# EAGLE board backplanev2-final (EAGLE 6.4), part 1 of 3
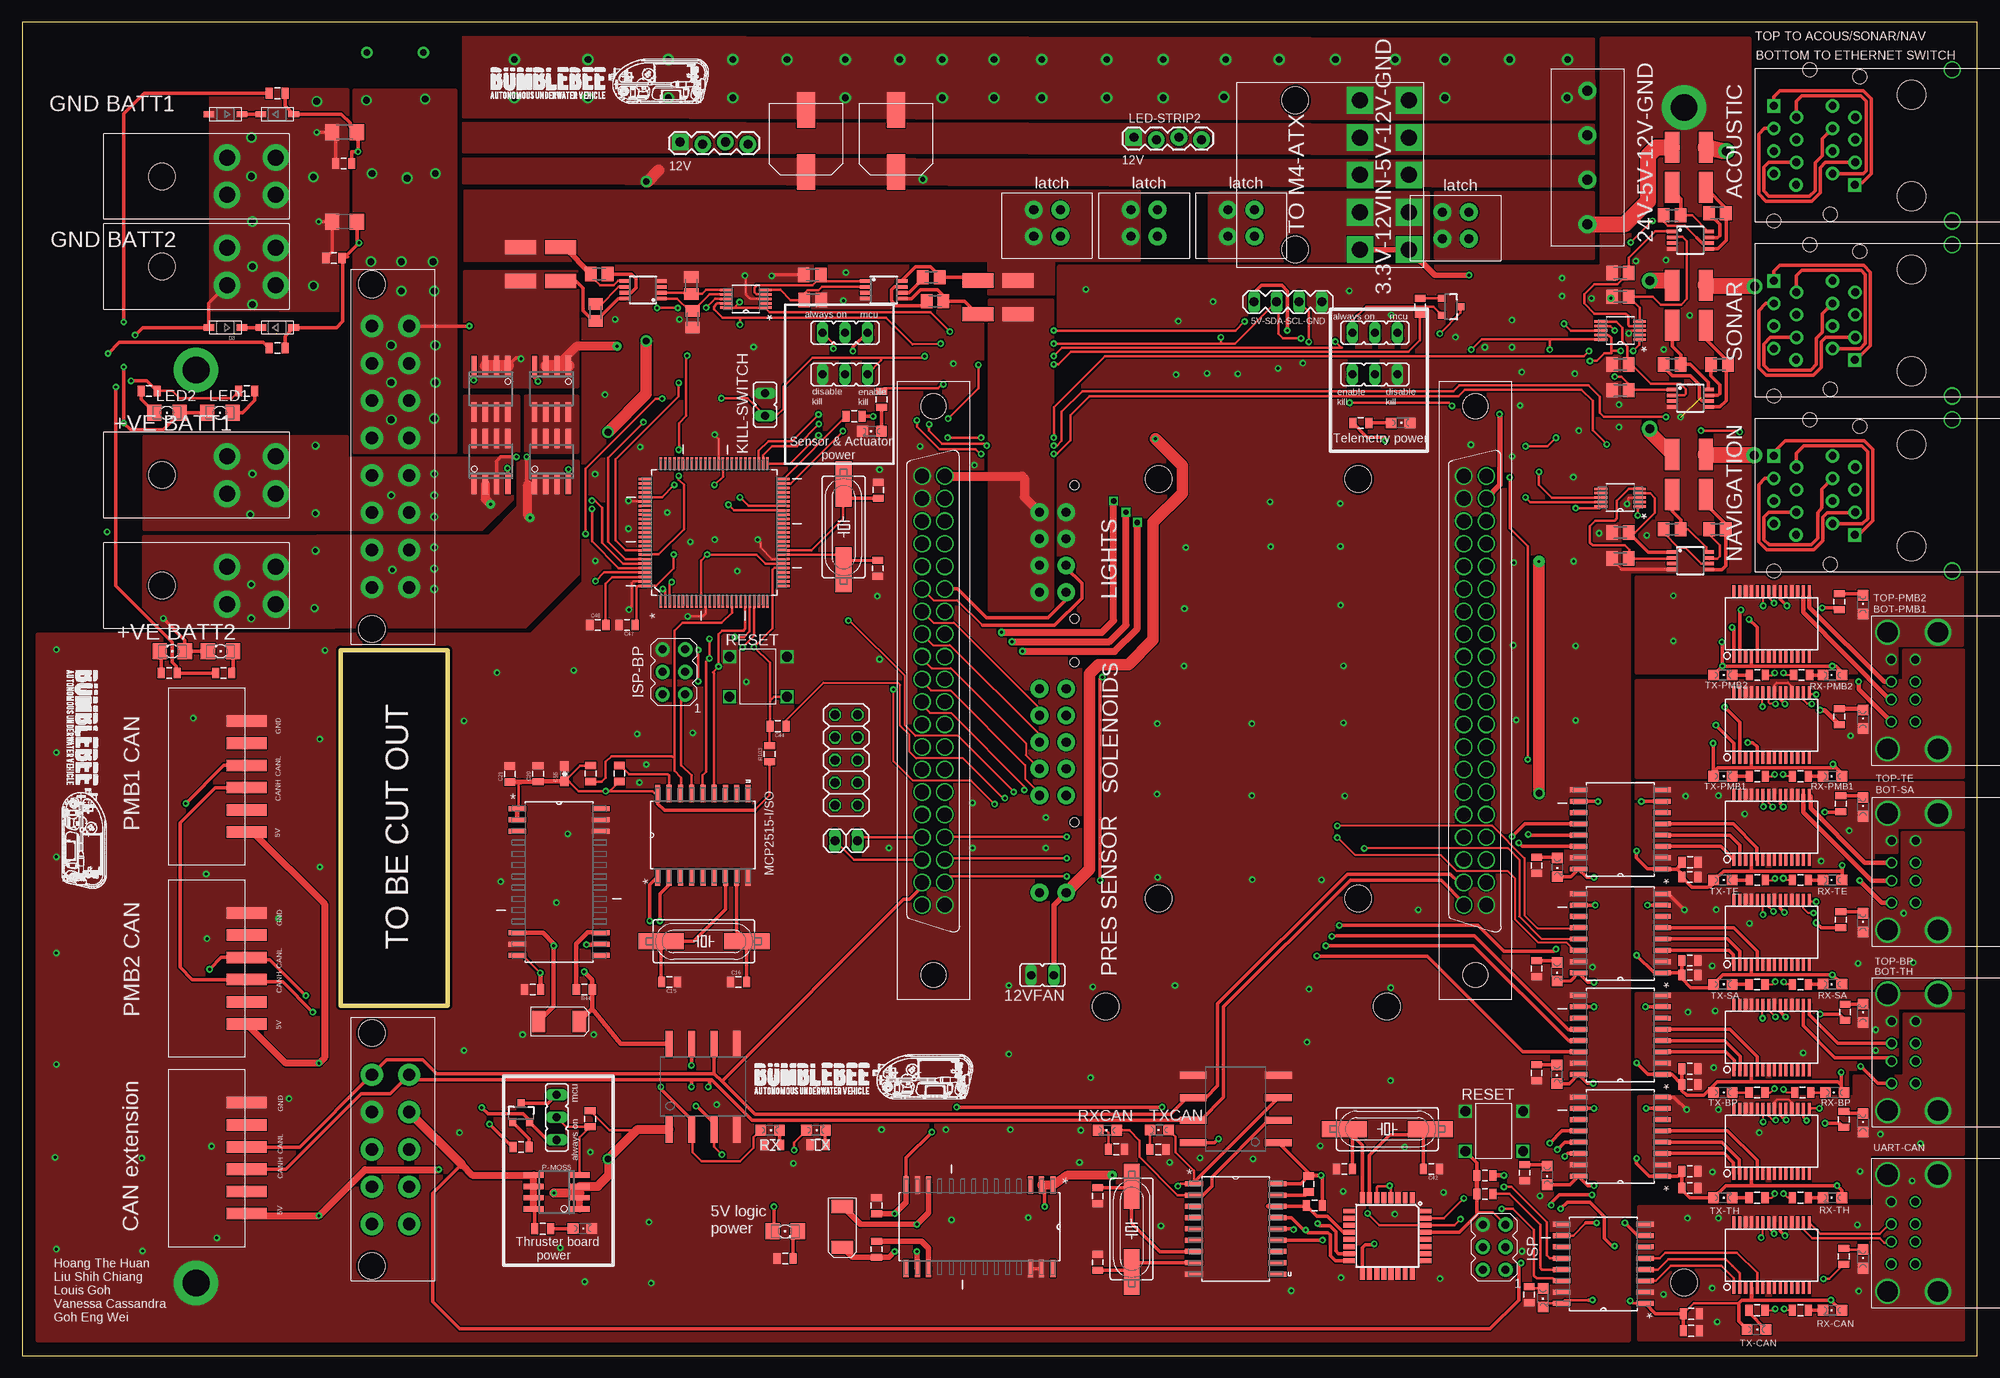
[diagram p0: board, top side]
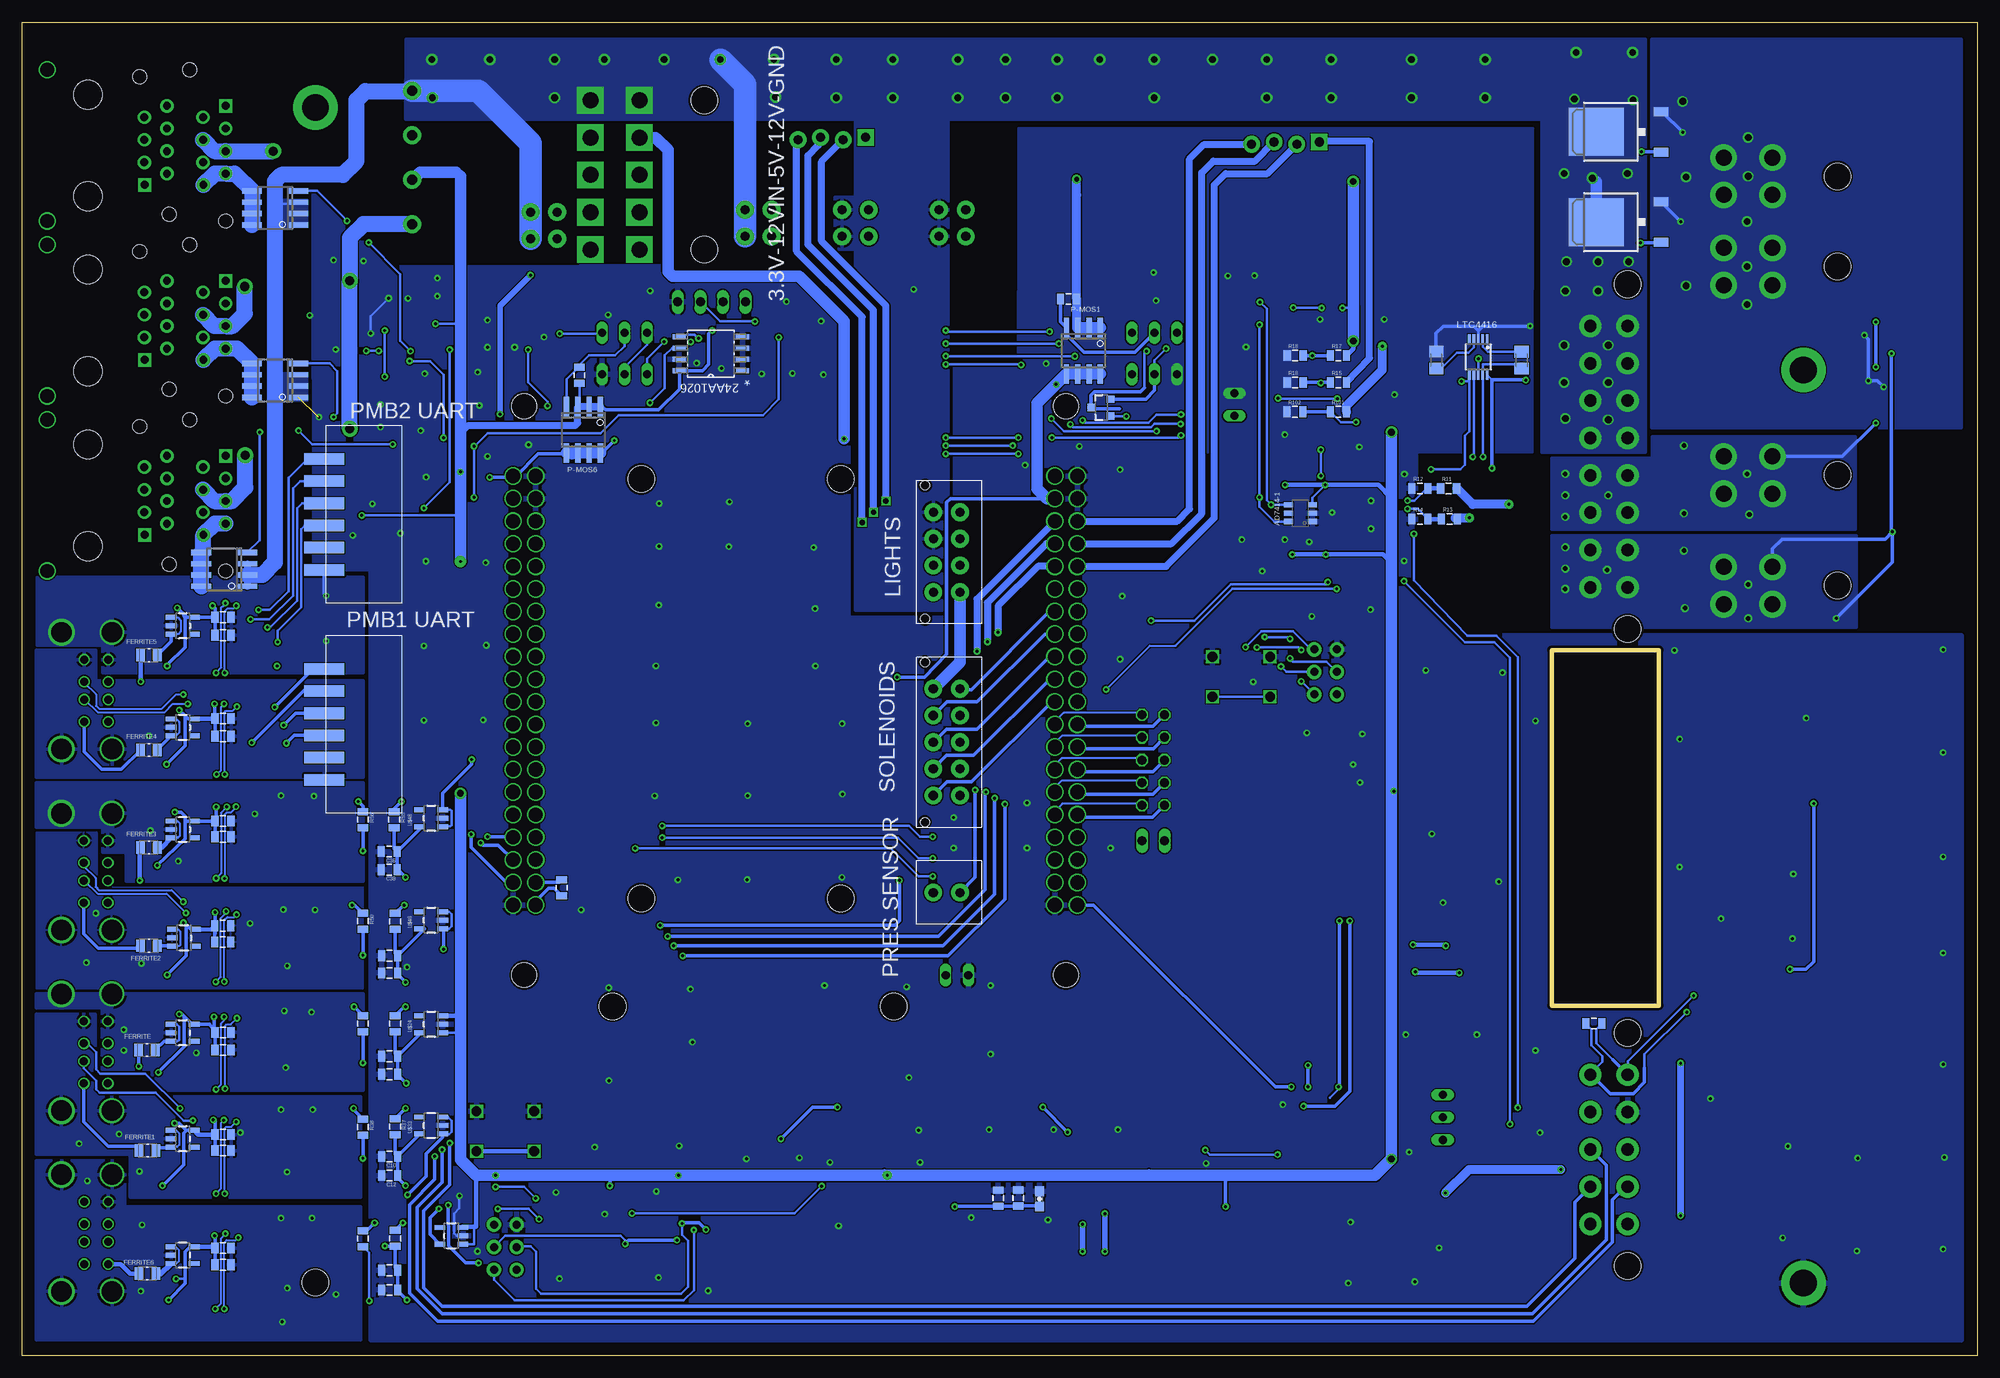
[diagram p1: board, bottom side, seen from below]

Size 220 x 150 mm. Coordinates in mm from the lower left corner, seen from the top.
Outline: 220,0 220,150 0,150 0,0 220,0
Outline: 35.81,79.38 47.88,79.38 47.88,39.37 35.81,39.37 35.81,79.38
Copper layers (1*16): Top 0.035mm / dielectric 1.5mm / Bottom 0.035mm
Design rules "DFRobot_Eagle_Rule_v0.4 *": minimum track width 8mil, minimum drill 12mil, track to track 6mil, track to pad 6mil, pad to pad 6mil, via to via 6mil, smd to smd 0mil, copper to edge 10mil, drill to drill 10mil, minimum pad ring 7mil, minimum via ring 8mil, stop-mask expansion 2mil, vias tented up to drill 25mil, thermal gap 10mil
Holes 3 mm at 150.34,98.6 150.34,51.41 127.89,51.41 127.89,98.6 121.92,39.29 153.57,39.29 187.02,8.2
Milling: 4 lines

## Footprints (pad centres in the part's own frame; a part is rotated, then mirrored left to right if it is on the bottom)
JP1 = drill 0.914 long: 1 0,-1.27; 2 0,1.27
SOIC127P794X200-8N = smd 1.473 x 0.559: 1 -3.581,1.905; 2 -3.581,0.635; 3 -3.581,-0.635; 4 -3.581,-1.905; 5 3.581,-1.905; 6 3.581,-0.635; 7 3.581,0.635; 8 3.581,1.905
SOT23-6 = smd 0.6 x 1.05: 1 -0.95,-1.35; 2 0,-1.35; 3 0.95,-1.35; 4 0.95,1.35; 5 0,1.35; 6 -0.95,1.35
SOIC127P1032X265-16N = smd 1.981 x 0.559: 1 -4.699,4.445; 2 -4.699,3.175; 3 -4.699,1.905; 4 -4.699,0.635; 5 -4.699,-0.635; 6 -4.699,-1.905; 7 -4.699,-3.175; 8 -4.699,-4.445; 9 4.699,-4.445; 10 4.699,-3.175; 11 4.699,-1.905; 12 4.699,-0.635; 13 4.699,0.635; 14 4.699,1.905; 15 4.699,3.175; 16 4.699,4.445
1206 = smd 1.6 x 1.8: 1 -1.4,0; 2 1.4,0
0805 = smd 0.8 x 1.2: 1 -0.9,0; 2 0.9,0
EIA6032 = smd 1.5 x 2.4: P$1 -2.3,0; P$2 2.3,0
0603-CAP = smd 1.1 x 1: 1 -0.85,0; 2 0.85,0
SOD-123 = smd 1.2 x 0.7: A 1.85,0; C -1.85,0
RESC2013X65N = smd 1.016 x 1.397: 1 -0.94,0; 2 0.94,0
MA04-1 = drill 1.016 long: 1 -3.81,0; 2 -1.27,0; 3 1.27,0; 4 3.81,0
AVRISP = drill 0.9 pad 1.626: 1 -1.27,2.54; 2 1.27,2.54; 3 -1.27,0; 4 1.27,0; 5 -1.27,-2.54; 6 1.27,-2.54
JP2 = drill 0.914 long: 1 -2.54,0; 2 0,0; 3 2.54,0
1206' = smd 1.6 x 1.803: A -1.422,0; C 1.422,0
1X04_LOCK = drill 1.016 pad 1.88 square: 1 0,0.127 | drill 1.016 pad 1.88: 2 2.54,-0.127; 3 5.08,0.127; 4 7.62,-0.127
MSOP10 = smd 0.3 x 1: 1 -1,-2.05; 2 -0.5,-2.05; 3 0,-2.05; 4 0.5,-2.05; 5 1,-2.05; 6 1,2.05; 7 0.5,2.05; 8 0,2.05; 9 -0.5,2.05; 10 -1,2.05
SOIC127P1034X264-18N = smd 1.981 x 0.559: 1 -4.699,5.08; 2 -4.699,3.81; 3 -4.699,2.54; 4 -4.699,1.27; 5 -4.699,0; 6 -4.699,-1.27; 7 -4.699,-2.54; 8 -4.699,-3.81; 9 -4.699,-5.08; 10 4.699,-5.08; 11 4.699,-3.81; 12 4.699,-2.54; 13 4.699,-1.27; 14 4.699,0; 15 4.699,1.27; 16 4.699,2.54; 17 4.699,3.81; 18 4.699,5.08
SOIC8 = smd 0.6 x 2.2: 1 -1.905,-2.6; 2 -0.635,-2.6; 3 0.635,-2.6; 4 1.905,-2.6; 5 1.905,2.6; 6 0.635,2.6; 7 -0.635,2.6; 8 -1.905,2.6
SOT23-3 = smd 0.8 x 0.9: 1 -0.95,-1; 2 0.95,-1; 3 0,1.1
SM49 = smd 5.08 x 1.778: 1 -4.826,0; 2 4.826,0
M0805 = smd 1.3 x 1.6: 1 -0.95,0; 2 0.95,0
CHIPLED_0805 = smd 1.2 x 1.2: A 0,-1.05; C 0,1.05
2X05 = drill 1.016 octagon: 1 -5.08,-1.27; 2 -5.08,1.27; 3 -2.54,-1.27; 4 -2.54,1.27; 5 0,-1.27; 6 0,1.27; 7 2.54,-1.27; 8 2.54,1.27; 9 5.08,-1.27; 10 5.08,1.27
1X02 = drill 1.016 long: 1 -1.27,0; 2 1.27,0
MC32829 = drill 1.1 square: P$1 -3.25,-2.25; P$2 -3.25,2.25; P$3 3.25,2.25; P$4 3.25,-2.25
TQFP32-08 = smd 1.27 x 0.559: 1 -4.293,2.8; 2 -4.293,2; 3 -4.293,1.2; 4 -4.293,0.4; 5 -4.293,-0.4; 6 -4.293,-1.2; 7 -4.293,-2; 8 -4.293,-2.8; 17 4.293,-2.8; 18 4.293,-2; 19 4.293,-1.2; 20 4.293,-0.4; 21 4.293,0.4; 22 4.293,1.2; 23 4.293,2; 24 4.293,2.8 | smd 0.559 x 1.27: 9 -2.8,-4.293; 10 -2,-4.293; 11 -1.2,-4.293; 12 -0.4,-4.293; 13 0.4,-4.293; 14 1.2,-4.293; 15 2,-4.293; 16 2.8,-4.293; 25 2.8,4.293; 26 2,4.293; 27 1.2,4.293; 28 0.4,4.293; 29 -0.4,4.293; 30 -1.2,4.293; 31 -2,4.293; 32 -2.8,4.293
SSOP28DB = smd 0.348 x 1.397: 1 -4.225,-3.656; 2 -3.575,-3.656; 3 -2.925,-3.656; 4 -2.275,-3.656; 5 -1.625,-3.656; 6 -0.975,-3.656; 7 -0.325,-3.656; 8 0.325,-3.656; 9 0.975,-3.656; 10 1.625,-3.656; 11 2.275,-3.656; 12 2.925,-3.656; 13 3.575,-3.656; 14 4.225,-3.656; 15 4.225,3.656; 16 3.575,3.656; 17 2.925,3.656; 18 2.275,3.656; 19 1.625,3.656; 20 0.975,3.656; 21 0.325,3.656; 22 -0.325,3.656; 23 -0.975,3.656; 24 -1.625,3.656; 25 -2.275,3.656; 26 -2.925,3.656; 27 -3.575,3.656; 28 -4.225,3.656
SOIC127P1032X265-12NA = smd 1.981 x 0.559: 1 -4.699,8.255; 2 -4.699,6.985; 3 -4.699,5.715; 12 -4.699,-5.715; 13 -4.699,-6.985; 14 -4.699,-8.255; 15 4.699,-8.255; 16 4.699,-6.985; 17 4.699,-5.715; 26 4.699,5.715; 27 4.699,6.985; 28 4.699,8.255
QFP50P1600X1600X120-100N = smd 1.473 x 0.279: 1 -7.747,5.994; 2 -7.747,5.512; 3 -7.747,5.004; 4 -7.747,4.496; 5 -7.747,3.988; 6 -7.747,3.505; 7 -7.747,2.997; 8 -7.747,2.489; 9 -7.747,2.007; 10 -7.747,1.499; 11 -7.747,0.991; 12 -7.747,0.508; 13 -7.747,0; 14 -7.747,-0.508; 15 -7.747,-0.991; 16 -7.747,-1.499; 17 -7.747,-2.007; 18 -7.747,-2.489; 19 -7.747,-2.997; 20 -7.747,-3.505; 21 -7.747,-3.988; 22 -7.747,-4.496; 23 -7.747,-5.004; 24 -7.747,-5.512; 25 -7.747,-5.994; 51 7.747,-5.994; 52 7.747,-5.512; 53 7.747,-5.004; 54 7.747,-4.496; 55 7.747,-3.988; 56 7.747,-3.505; 57 7.747,-2.997; 58 7.747,-2.489; 59 7.747,-2.007; 60 7.747,-1.499; 61 7.747,-0.991; 62 7.747,-0.508; 63 7.747,0; 64 7.747,0.508; 65 7.747,0.991; 66 7.747,1.499; 67 7.747,2.007; 68 7.747,2.489; 69 7.747,2.997; 70 7.747,3.505; 71 7.747,3.988; 72 7.747,4.496; 73 7.747,5.004; 74 7.747,5.512; 75 7.747,5.994 | smd 0.279 x 1.473: 26 -5.994,-7.747; 27 -5.512,-7.747; 28 -5.004,-7.747; 29 -4.496,-7.747; 30 -3.988,-7.747; 31 -3.505,-7.747; 32 -2.997,-7.747; 33 -2.489,-7.747; 34 -2.007,-7.747; 35 -1.499,-7.747; 36 -0.991,-7.747; 37 -0.508,-7.747; 38 0,-7.747; 39 0.508,-7.747; 40 0.991,-7.747; 41 1.499,-7.747; 42 2.007,-7.747; 43 2.489,-7.747; 44 2.997,-7.747; 45 3.505,-7.747; 46 3.988,-7.747; 47 4.496,-7.747; 48 5.004,-7.747; 49 5.512,-7.747; 50 5.994,-7.747; 76 5.994,7.747; 77 5.512,7.747; 78 5.004,7.747; 79 4.496,7.747; 80 3.988,7.747; 81 3.505,7.747; 82 2.997,7.747; 83 2.489,7.747; 84 2.007,7.747; 85 1.499,7.747; 86 0.991,7.747; 87 0.508,7.747; 88 0,7.747; 89 -0.508,7.747; 90 -0.991,7.747; 91 -1.499,7.747; 92 -2.007,7.747; 93 -2.489,7.747; 94 -2.997,7.747; 95 -3.505,7.747; 96 -3.988,7.747; 97 -4.496,7.747; 98 -5.004,7.747; 99 -5.512,7.747; 100 -5.994,7.747
TERM-BLOCK-4POS = drill 1.1 pad 2: P$1 2.5,4.1; P$2 7.5,4.1; P$3 12.5,4.1; P$4 17.5,4.1
PLATED-HOLE = drill 3 pad 5: P$1 0,0
RJ45DOUBLESOCKET = drill 1.57 pad 1.8: CHA5 0,0; CHA6 17.01,0 | drill 0.89 pad 1.5 square: L1 4.06,10.96; U1 12.95,20.06 | drill 0.89 pad 1.5: L2 5.33,13.46; L3 6.6,10.92; L4 7.87,13.46; L5 9.14,10.92; L6 10.41,13.46; L7 11.68,10.92; L8 12.95,13.46; U2 11.68,17.52; U3 10.41,20.06; U4 9.14,17.52; U5 7.87,20.06; U6 6.6,17.52; U7 5.33,20.06; U8 4.06,17.56 | hole 3.25: 2.79,4.57; 14.22,4.57 | hole 1.57: 17.01,16; 0,20.06; 0.76,13.71; 16.25,10.41
MINIFIT-16CKT-STRAIGHTHEADER = drill 1.4 pad 2.5: L1 35.81,2.94; L2 31.61,2.94; L3 27.41,2.94; L4 23.21,2.94; L5 19.01,2.94; L6 14.81,2.94; L7 10.61,2.94; L8 6.41,2.94; U1 35.81,7.14; U2 31.61,7.14; U3 27.41,7.14; U4 23.21,7.14; U5 19.01,7.14; U6 14.81,7.14; U7 10.61,7.14; U8 6.41,7.14 | hole 3: 40.51,7.14; 1.71,7.14
100UF-AFK-CAP = smd 2 x 4: NEG 4.15,0.7; POS 4.15,7.7
MSOP8 = smd 0.4 x 1.2: 1 -0.975,-2.05; 2 -0.325,-2.05; 3 0.325,-2.05; 4 0.975,-2.05; 5 0.975,2.05; 6 0.325,2.05; 7 -0.325,2.05; 8 -0.975,2.05
TO252 = smd 1 x 1.6: 1 -2.28,-4.8; 2 2.28,-4.8 | smd 5.4 x 6.2: 3 0,2.5
S6B-XH-SM4-TB(LF)(SN) = smd 1.3 x 4.5: P$1 3.8,8.75; P$2 6.3,8.75; P$3 8.8,8.75; P$4 11.3,8.75; P$5 13.8,8.75; P$6 16.3,8.75
FCN-365J040-BACKPLANE-JACK = drill 1.6 pad 1.85: A1 10.625,5.415; A2 13.17,5.42; A3 15.71,5.42; A4 18.25,5.42; A5 20.79,5.42; A6 23.33,5.42; A7 25.87,5.42; A8 28.41,5.42; A9 30.95,5.42; A10 33.49,5.42; A11 36.03,5.42; A12 38.57,5.42; A13 41.11,5.42; A14 43.65,5.42; A15 46.19,5.42; A16 48.73,5.42; A17 51.27,5.42; A18 53.81,5.42; A19 56.35,5.42; A20 58.89,5.42; B1 10.625,2.875; B2 13.17,2.88; B3 15.71,2.88; B4 18.25,2.88; B5 20.79,2.88; B6 23.33,2.88; B7 25.87,2.88; B8 28.41,2.88; B9 30.95,2.88; B10 33.49,2.88; B11 36.03,2.88; B12 38.57,2.88; B13 41.11,2.88; B14 43.65,2.88; B15 46.19,2.88; B16 48.73,2.88; B17 51.27,2.88; B18 53.81,2.88; B19 56.35,2.88; B20 58.89,2.88 | hole 2.8: 2.75,4.125; 66.75,4.125
MICROFIT-2CKT-HEADER = drill 1.02 pad 2: PIN1 3.58,-1.9; PIN2 3.58,-4.9
MICROFIT-8CKT-HEADER = drill 1.02 pad 2: BOT1 3.59,-4.91; BOT2 6.59,-4.91; BOT3 9.59,-4.91; BOT4 12.59,-4.91; TOP1 3.59,-1.91; TOP2 6.59,-1.91; TOP3 9.59,-1.91; TOP4 12.59,-1.91 | hole 1.02: 0.59,-0.97; 15.59,-0.97
MICROFIT-10CKT-HEADER = drill 1.02 pad 2: B1 3.57,-4.9; B2 6.57,-4.9; B3 9.57,-4.9; B4 12.57,-4.9; B5 15.57,-4.9; T1 3.57,-1.9; T2 6.57,-1.9; T3 9.57,-1.9; T4 12.57,-1.9; T5 15.57,-1.9 | hole 1.02: 0.57,-0.96; 18.57,-0.96
SOP50P490X110-10N = smd 1.422 x 0.279: 1 -2.184,0.991; 2 -2.184,0.508; 3 -2.184,0; 4 -2.184,-0.508; 5 -2.184,-0.991; 6 2.184,-0.991; 7 2.184,-0.508; 8 2.184,0; 9 2.184,0.508; 10 2.184,0.991
LVK25R002FER(CURRENT-SENSE-R) = smd 1.6 x 3.5: I1 0.8,1.75; I2 4.6,1.75; V1 0.8,6.25; V2 4.6,6.25
SOT23-5 = smd 0.55 x 1.2: 1 -0.95,-1.3; 2 0,-1.3; 3 0.95,-1.3; 4 0.95,1.3; 5 -0.95,1.3
USB-DUAL-SOCKET = drill 2.3 pad 2.8: CHA1 1.89,15.91; CHA3 15.03,15.91 | drill 2.3 pad 3: CHA2 1.89,10.24; CHA4 15.03,10.23 | drill 0.9 pad 1.2: L1 4.96,12.78; L2 7.46,12.78; L3 9.46,12.78; L4 11.96,12.78; U1 4.96,15.48; U2 7.46,15.48; U3 9.46,15.48; U4 11.96,15.48
DUB-8 = smd 0.8 x 3: 1 -3.81,-4.8; 2 -1.27,-4.8; 3 1.27,-4.8; 4 3.81,-4.8; 5 3.81,4.8; 6 1.27,4.8; 7 -1.27,4.8; 8 -3.81,4.8
MINIFIT-4CKT-2ROW-W2B-90DEG = drill 1.8 pad 3: LL -2.1,7.3; LR 2.1,7.3; UL -2.1,12.8; UR 2.1,12.8 | hole 3: 0,0
MOLEX-MINIFIT-10CKT2ROW-90DEG-HEADER = drill 1.8 pad 3 square: A1 0,12.8; A2 4.2,12.8; A3 8.4,12.8; A4 12.6,12.8; A5 16.8,12.8; B1 0,7.3; B2 4.2,7.3; B3 8.4,7.3; B4 12.6,7.3; B5 16.8,7.3 | hole 3: 0,0; 16.8,0
MINIFIT-10CKT-STRAIGHTHEADER = drill 1.4 pad 2.5: L1 23.21,2.94; L2 19.01,2.94; L3 14.81,2.94; L4 10.61,2.94; L5 6.41,2.94; U1 23.21,7.14; U2 19.01,7.14; U3 14.81,7.14; U4 10.61,7.14; U5 6.41,7.14 | hole 3: 27.91,7.14; 1.71,7.14
MICROFIT-4CKT-HEADER = drill 1.02 pad 2: BOT1 3.59,-4.91; BOT2 6.59,-4.91; TOP1 3.59,-1.91; TOP2 6.59,-1.91

## Placement (x,y rotation side)
12VFAN  [JP1]  114.81,42.8 90 top
24AA1026  24AA1026-I/SM  [SOIC127P794X200-8N]  142.51,112.71 180 bottom
AD7414-1  AD7414-1  [SOT23-6]  76.17,94.77 90 bottom
ADUM1  ADUM1402  [SOIC127P1032X265-16N]  177.93,10.31 180 top
ADUM2  ADUM1402  [SOIC127P1032X265-16N]  179.83,24.64 180 top
ADUM3  ADUM1402  [SOIC127P1032X265-16N]  179.83,47.5 180 top
ADUM4  ADUM1402  [SOIC127P1032X265-16N]  179.83,59.18 180 top
ADUM1402  ADUM1402  [SOIC127P1032X265-16N]  179.83,36.07 180 top
C1  1uF  [1206]  36.27,137.62 180 top
C2  1uF  [1206]  36.27,127.56 180 top
C3  0.1uF  [0805]  187.66,32.26 0 top
C4  10uF  [0805]  178.66,33.68 180 bottom
C5  10uF  [0805]  187.66,30.48 0 top
C6  0.1uF  [0805]  178.66,31.65 180 bottom
C7  0.1uF  [0805]  197.41,36.35 0 bottom
C8  10uF  [0805]  197.41,34.39 0 bottom
C9  0.1uF  [0805]  187.66,20.73 0 top
C10  10uF  [0805]  178.66,22.4 180 bottom
C11  10uF  [0805]  187.66,18.85 0 top
C12  0.1uF  [0805]  178.66,20.24 180 bottom
C13  0.1uF  [0805]  197.41,23.06 0 bottom
C14  10uF  [0805]  197.41,24.87 0 bottom
C15  22pF  [0805]  72.83,42.02 180 top
C16  22pF  [0805]  80.59,42.03 0 top
C17  22pF  [0805]  96.28,88.57 90 top
C18  22pF  [0805]  96.34,97.36 270 top
C19  100nF  [0805]  57.45,41.2 0 top
C20  100nF  [0805]  58.05,65.46 90 top
C21  100nF  [0805]  54.86,65.42 90 top
C22  22pF  [0805]  121.01,17.96 90 top
C23  22pF  [0805]  121.02,10.49 270 top
C24  0.1uF  [0805]  187.81,2.8 0 top
C25  10uF  [0805]  178.66,9.6 180 bottom
C26  100nF  [0805]  96.14,16.87 270 top
C27  100nF  [0805]  110.17,17.71 90 bottom
C28  100nF  [0805]  107.91,17.73 90 bottom
C29  0.1uF  [0805]  187.66,44.45 0 top
C30  10uF  [0805]  178.66,43.05 180 bottom
C31  10uF  [0805]  187.66,42.82 0 top
C32  0.1uF  [0805]  178.66,44.98 180 bottom
C33  0.1uF  [0805]  197.43,48.36 0 bottom
C34  10uF  [0805]  197.43,46.51 0 bottom
C35  0.1uF  [0805]  187.68,55.5 0 top
C36  10uF  [0805]  178.71,56.69 180 bottom
C37  10uF  [0805]  187.66,53.85 0 top
C38  0.1uF  [0805]  178.71,54.66 180 bottom
C39  0.1uF  [0805]  197.41,60.15 0 bottom
C40  10uF  [0805]  197.41,58.37 0 bottom
C41  10uF  [0805]  164.59,18.19 180 top
C42  22pF  [0805]  158.57,21.01 180 top
C43  22pF  [0805]  148.79,20.98 0 top
C44  10uF  [0805]  85.04,70.79 180 top
C45  0.1uF  [0805]  197.41,69.67 0 bottom
C46  10uF  [0805]  197.41,71.65 0 bottom
C47  10uF  [0805]  68.07,82.19 180 top
C48  10uF  [0805]  64.77,82.19 0 top
C51  0.1uF  [0805]  197.41,81.03 0 bottom
C52  10uF  [0805]  197.41,83.06 0 bottom
C53  [EIA6032]  92.3,14.48 90 top
C54  [EIA6032]  60.41,37.59 180 top
C55  [0603-CAP]  61.01,65.45 90 top
C56  [0603-CAP]  105.54,17.63 90 bottom
C57  10uF  [0805]  187.81,4.7 0 top
C58  0.1uF  [0805]  178.66,7.39 180 bottom
C59  0.1uF  [0805]  197.41,12.09 0 bottom
C60  10uF  [0805]  197.41,10.21 0 bottom
D1  10V Zener  [SOD-123]  22.86,139.65 180 top
D2  [SOD-123]  28.7,139.65 0 top
D3  10V Zener  [SOD-123]  22.86,115.65 180 top
D4  [SOD-123]  28.7,115.65 0 top
FERRITE  [RESC2013X65N]  205.97,34.39 0 bottom
FERRITE1  [RESC2013X65N]  205.89,23.06 0 bottom
FERRITE2  [RESC2013X65N]  205.74,46.1 0 bottom
FERRITE3  [RESC2013X65N]  205.74,57.15 0 bottom
FERRITE4  [RESC2013X65N]  205.74,68.12 0 bottom
FERRITE5  [RESC2013X65N]  205.74,78.79 0 bottom
FERRITE6  [RESC2013X65N]  205.92,9.22 0 bottom
I2C  [MA04-1]  142.42,118.54 180 top
ISP  AVRISP-6  [AVRISP]  165.63,12.19 180 top
ISP-BP  AVRISP-6  [AVRISP]  73.33,76.91 180 top
JP5  [JP2]  60.15,26.79 90 top
JP6  [JP2]  92.58,115.06 0 top
JP8  [JP2]  92.58,110.39 180 top
JP9  [JP2]  152.22,115.06 0 top
JP10  [JP2]  152.22,110.39 180 top
KILL-SWITCH  [JP1]  83.59,106.98 180 top
LED1  [1206']  22.25,106.07 0 top
LED2  [1206']  16.29,106.07 0 top
LED3  [1206']  16.89,79.22 180 top
LED4  [1206']  22.32,79.22 180 top
LED5  5V logic power  [1206']  85.85,13.97 0 top
LED-STRIP1  LED STRIP  [1X04_LOCK]  74.04,136.4 0 top
LED-STRIP2  LED STRIP  [1X04_LOCK]  125.08,136.91 0 top
LTC4416  LTC4416  [MSOP10]  56.16,112.35 180 bottom
MCP2515-I/SO  MCP2515-I/SO  [SOIC127P1034X264-18N]  76.6,58.55 90 top
P-MOS  P-MOS  [SOIC8]  59.56,108.76 180 top
P-MOS1  P-MOS  [SOIC8]  100.58,113.03 180 bottom
P-MOS2  P-MOS  [SOIC8]  59.56,100.58 0 top
P-MOS3  P-MOS  [SOIC8]  52.76,108.76 180 top
P-MOS4  P-MOS  [SOIC8]  52.76,100.58 0 top
P-MOS5  P-MOS  [SOIC8]  60.15,18.4 90 top
P-MOS6  P-MOS  [SOIC8]  156.84,104.14 180 bottom
Q1  MMBT2222A  [SOT23-3]  98.55,106.65 90 bottom
Q2  MMBT2222A  [SOT23-3]  56.13,27.26 0 top
Q3  16Mhz  [SM49]  124.84,14.23 270 top
Q4  16Mhz  [SM49]  76.71,46.61 0 top
Q5  16Mhz  [SM49]  92.44,93.22 90 top
Q6  MMBT2222A  [SOT23-3]  160.76,117.98 270 top
Q7  16Mhz  [SM49]  153.62,25.48 180 top
R1  10k  [M0805]  51.28,111.98 270 bottom
R2  10k  [M0805]  60.87,112.01 270 bottom
R3  300  [0805]  14.27,108.51 180 top
R4  300  [0805]  25.27,108.51 0 top
R5  1M  [0805]  36.17,134.11 0 top
R6  1M  [0805]  28.7,142.01 180 top
R7  300  [0805]  22.66,76.78 0 top
R8  300  [0805]  16.54,76.78 180 top
R9  1M  [0805]  35.08,123.47 0 top
R10  [0805]  28.7,113.34 180 top
R11  [0805]  59.49,97.56 0 bottom
R12  [0805]  62.71,97.56 0 bottom
R13  [0805]  59.39,94.11 0 bottom
R14  [0805]  62.71,94.11 0 bottom
R15  [0805]  71.88,109.47 0 bottom
R16  [0805]  76.76,109.47 0 bottom
R17  [0805]  71.88,112.5 0 bottom
R18  [0805]  76.76,112.5 0 bottom
R19  [M0805]  75.44,116.59 270 top
R20  [M0805]  75.29,120.4 90 top
R21  [M0805]  64.92,121.67 0 top
R22  [M0805]  64.52,117.35 90 top
R23  [M0805]  88.9,121.56 180 top
R24  [M0805]  88.95,118.75 0 top
R25  [M0805]  102.72,118.62 180 top
R26  [M0805]  102.31,121.31 180 top
R27  10k  [0805]  102.26,118.85 0 bottom
R28  1k  [0805]  93.62,105.66 180 top
R29  10k  [0805]  63.9,26.62 90 top
R30  1k  [0805]  56.14,23.47 180 top
R31  [0805]  178.03,37.34 270 bottom
R32  [0805]  181.66,37.34 270 bottom
R33  300  [0805]  195.22,29.59 180 top
R34  300  [0805]  200.36,29.59 0 top
R35  300  [0805]  205.13,38.63 90 top
R36  300  [0805]  170.41,31.8 270 top
R37  [0805]  178.03,25.76 270 bottom
R38  [0805]  181.66,25.7 270 bottom
R39  300  [0805]  200.1,17.75 0 top
R40  300  [0805]  195.22,17.75 180 top
R41  300  [0805]  204.98,26.57 90 top
R42  300  [0805]  169.06,20.57 270 top
R43  10k  [0805]  67.18,65.48 270 top
R44  [0805]  63.25,41.19 180 top
R45  [0805]  178.03,13.18 270 bottom
R46  10k  [0805]  144.75,19.3 90 top
R47  10k  [0805]  96.14,11.96 90 top
R48  10k  [0805]  145.42,16.87 180 top
R49  [0805]  178.03,48.84 270 bottom
R50  [0805]  181.66,48.87 270 bottom
R51  300  [0805]  195.22,41.76 180 top
R52  300  [0805]  200.1,41.76 0 top
R53  300  [0805]  204.65,49.02 90 top
R54  300  [0805]  170.41,43.54 270 top
R55  [0805]  178.16,60.3 270 bottom
R56  [0805]  181.66,60.3 270 bottom
R57  300  [0805]  195.25,53.49 180 top
R58  300  [0805]  200.1,53.49 0 top
R59  300  [0805]  204.65,62.08 90 top
R60  300  [0805]  170.41,55.14 270 top
R61  300  [0805]  127.81,23.19 180 top
R62  300  [0805]  123.11,23.22 180 top
R63  300  [0805]  195.25,65.18 180 top
R64  300  [0805]  200.1,65.18 0 top
R65  300  [0805]  204.47,71.88 90 top
R66  300  [0805]  150.63,104.93 0 top
R67  300  [0805]  58.57,14.27 0 top
R68  [0805]  96.7,107.57 270 top
R69  300  [0805]  195.25,76.56 180 top
R70  300  [0805]  200.23,76.56 0 top
R71  300  [0805]  204.47,84.81 90 top
R72  [0805]  164.59,20.27 180 top
R73  10k  [0805]  63.96,65.48 90 top
R74  [0805]  181.66,13.16 270 bottom
R75  300  [0805]  200.1,5.11 0 top
R76  300  [0805]  195.22,5.11 180 top
R77  300  [0805]  204.98,11.15 90 top
R78  300  [0805]  169.58,6.86 270 top
R79  [0805]  157.3,110.29 270 bottom
R80  1k  [0805]  157.3,118.03 270 top
R81  [M0805]  179.83,121.79 180 top
R82  [M0805]  179.83,119.13 180 top
R83  [M0805]  190.75,128.52 180 top
R84  [M0805]  185.67,128.27 180 top
R85  [M0805]  179.83,108.58 180 top
R86  [M0805]  179.83,111.51 180 top
R87  [M0805]  191.01,111.51 180 top
R88  [M0805]  185.67,111.51 180 top
R89  [M0805]  179.83,92.58 180 top
R90  [M0805]  179.83,89.66 180 top
R91  [M0805]  190.75,92.96 180 top
R92  [M0805]  185.67,92.96 180 top
R93  300  [0805]  89.56,23.72 0 top
R94  300  [0805]  84.43,23.67 0 top
R95  300  [0805]  85.85,10.92 0 top
R101  [0805]  71.88,106.17 0 bottom
R102  [0805]  76.78,106.17 0 bottom
R103  [0805]  84.1,67.69 90 top
R104  120  [0805]  43.15,37.34 180 bottom
R105  120  [0805]  159.31,52.63 270 bottom
RX  [CHIPLED_0805]  84.15,25.35 270 top
RX-BP  [CHIPLED_0805]  203.96,29.59 90 top
RX-CAN  [CHIPLED_0805]  203.71,5.11 90 top
RX-PMB1  [CHIPLED_0805]  203.71,65.18 90 top
RX-PMB2  [CHIPLED_0805]  203.71,76.56 90 top
RX-SA  [CHIPLED_0805]  203.71,41.78 90 top
RX-TE  [CHIPLED_0805]  203.71,53.49 90 top
RX-TH  [CHIPLED_0805]  203.71,17.75 90 top
RXCAN  [CHIPLED_0805]  122.12,25.35 90 top
SA  [CHIPLED_0805]  95.61,103.99 90 top
SPARE  SA SPARE  [2X05]  92.74,67 270 top
SPARE2  SA SPARE  [1X02]  92.71,57.91 180 top
SW1  RESET  [MC32829]  165.63,25.22 180 top
SW2  RESET  [MC32829]  82.83,76.35 180 top
SW_5V_BP  [CHIPLED_0805]  172.69,31.65 180 top
SW_5V_CAN  [CHIPLED_0805]  171.13,6.5 180 top
SW_5V_SA  [CHIPLED_0805]  172.72,43.18 180 top
SW_5V_TE  [CHIPLED_0805]  172.75,54.94 180 top
SW_5V_TH  [CHIPLED_0805]  171.6,20.27 180 top
SW_USB_BP  [CHIPLED_0805]  207.14,38.51 0 top
SW_USB_CAN  [CHIPLED_0805]  207.14,10.87 0 top
SW_USB_PMB1  [CHIPLED_0805]  207.14,71.58 0 top
SW_USB_PMB2  [CHIPLED_0805]  207.14,84.48 0 top
SW_USB_SA  [CHIPLED_0805]  207.14,26.19 0 top
SW_USB_SA1  [CHIPLED_0805]  207.14,48.72 0 top
SW_USB_TE  [CHIPLED_0805]  207.14,61.72 0 top
TE  [CHIPLED_0805]  155.1,104.93 270 top
TH  [CHIPLED_0805]  63.04,14.3 270 top
TX  [CHIPLED_0805]  89.31,25.35 270 top
TX-BP  [CHIPLED_0805]  191.36,29.59 270 top
TX-CAN  [CHIPLED_0805]  195.15,2.92 270 top
TX-PMB1  [CHIPLED_0805]  191.36,65.18 270 top
TX-PMB2  [CHIPLED_0805]  191.36,76.56 270 top
TX-SA  [CHIPLED_0805]  191.36,41.76 270 top
TX-TE  [CHIPLED_0805]  191.36,53.49 270 top
TX-TH  [CHIPLED_0805]  191.36,17.75 270 top
TXCAN  [CHIPLED_0805]  127.97,25.37 90 top
U1  ATMEGA328P_TQFP  [TQFP32-08]  153.62,13.46 270 top
U2  FT232RLSSOP  [SSOP28DB]  196.85,35.79 0 top
U3  FT232RLSSOP  [SSOP28DB]  196.85,24.1 0 top
U4  DCR010505U  [SOIC127P1032X265-12NA]  107.72,14.48 270 top
U5  DCR010505U  [SOIC127P1032X265-12NA]  60.41,53.27 0 top
U6  FT232RLSSOP  [SSOP28DB]  196.85,11.3 0 top
U7  FT232RLSSOP  [SSOP28DB]  196.85,47.62 0 top
U8  FT232RLSSOP  [SSOP28DB]  196.85,59.44 0 top
U9  FT232RLSSOP  [SSOP28DB]  196.85,70.92 0 top
U11  FT232RLSSOP  [SSOP28DB]  196.85,82.32 0 top
U13  ATMEGA2560-16AU  [QFP50P1600X1600X120-100N]  77.86,92.59 90 top
U$1  TERM-BLOCK-4POS  [TERM-BLOCK-4POS]  172.01,144.78 270 top
U$2  PLATED-HOLE  [PLATED-HOLE]  19.57,8.15 0 top
U$3  RJ45-DUAL-SOCKET  [RJ45DOUBLESOCKET]  217.17,127.64 90 top
U$4  MINIFIT-16CKT-STRAIGHTHEADER  [MINIFIT-16CKT-STRAIGHTHEADER]  46.48,80.01 90 top
U$5  100UF  [100UF-AFK-CAP]  92.35,140.84 180 top
U$6  LTC6103  [MSOP8]  69.85,119.89 90 top
U$7  IRLR3636PBF(N-MOS)  [TO252]  40.39,127.51 90 bottom
U$8  S6B-XH-SM4-TB(LF)(SN)  [S6B-XH-SM4-TB(LF)(SN)]  177.29,60.96 90 bottom
U$9  S6B-XH-SM4-TB(LF)(SN)  [S6B-XH-SM4-TB(LF)(SN)]  177.29,84.58 90 bottom
U$10  S6B-XH-SM4-TB(LF)(SN)  [S6B-XH-SM4-TB(LF)(SN)]  16.51,53.59 270 top
U$11  [FCN-365J040-BACKPLANE-JACK]  167.64,40.06 90 top
U$12  LTC6103  [MSOP8]  96.95,119.89 270 top
U$13  MICROFIT-2CK-HEADER  [MICROFIT-2CKT-HEADER]  119.38,48.5 90 bottom
U$14  MICROFIT-8CKT-HEADER  [MICROFIT-8CKT-HEADER]  119.38,82.3 90 bottom
U$15  MICROFIT-10CKT-HEADER  [MICROFIT-10CKT-HEADER]  119.38,59.44 90 bottom
U$16  [FCN-365J040-BACKPLANE-JACK]  106.68,40.06 90 top
U$17  S6B-XH-SM4-TB(LF)(SN)  [S6B-XH-SM4-TB(LF)(SN)]  16.51,32.26 270 top
U$18  ADS1115  [SOP50P490X110-10N]  81.43,118.87 180 top
U$19  S6B-XH-SM4-TB(LF)(SN)  [S6B-XH-SM4-TB(LF)(SN)]  16.51,75.18 270 top
U$20  LVK25R002FER(CURRENT-SENSE-R)  [LVK25R002FER(CURRENT-SENSE-R)]  54.36,125.48 270 top
U$21  LVK25R002FER(CURRENT-SENSE-R)  [LVK25R002FER(CURRENT-SENSE-R)]  113.79,116.33 90 top
U$22  100UF  [100UF-AFK-CAP]  102.46,140.84 180 top
U$23  MIC2005A-1YM5  [SOT23-5]  201.96,36.32 270 bottom
U$24  MIC2005A-1YM5  [SOT23-5]  173.99,37.26 90 bottom
U$25  MCP2515-I/SO  [SOIC127P1034X264-18N]  136.55,14.25 0 top
U$26  RJ45-DUAL-SOCKET  [RJ45DOUBLESOCKET]  217.17,107.95 90 top
U$27  RJ45-DUAL-SOCKET  [RJ45DOUBLESOCKET]  217.17,88.27 90 top
U$28  MIC2005A-1YM5  [SOT23-5]  201.93,59.18 270 bottom
U$29  USB-DUAL-SOCKET  [USB-DUAL-SOCKET]  225.81,66.34 90 top
U$30  USB-DUAL-SOCKET  [USB-DUAL-SOCKET]  225.83,25.65 90 top
U$31  MIC2005A-1YM5  [SOT23-5]  201.96,24.38 270 bottom
U$32  IRLR3636PBF(N-MOS)  [TO252]  40.39,137.67 90 bottom
U$33  MIC2005A-1YM5  [SOT23-5]  173.99,25.88 90 bottom
U$34  ISO1050  [DUB-8]  136.55,27.74 90 top
U$35  MINIFIT-4CKT-2ROW-W2B-90DEG  [MINIFIT-4CKT-2ROW-W2B-90DEG]  15.75,122.51 270 top
U$36  MINIFIT-4CKT-2ROW-W2B-90DEG  [MINIFIT-4CKT-2ROW-W2B-90DEG]  15.75,132.67 270 top
U$37  MINIFIT-4CKT-2ROW-W2B-90DEG  [MINIFIT-4CKT-2ROW-W2B-90DEG]  15.75,99.06 270 top
U$38  MINIFIT-4CKT-2ROW-W2B-90DEG  [MINIFIT-4CKT-2ROW-W2B-90DEG]  15.75,86.61 270 top
U$39  MOLEX-MINIFIT-10CKT2ROW-90DEG-HEADER  [MOLEX-MINIFIT-10CKT2ROW-90DEG-HEADER]  143.26,141.22 270 top
U$40  ISO1050  [DUB-8]  76.6,30.26 0 top
U$41  USB-DUAL-SOCKET  [USB-DUAL-SOCKET]  225.81,5.33 90 top
U$44  MIC2005A-1YM5  [SOT23-5]  201.8,46.99 270 bottom
U$45  MINIFIT-10CKT-STRAIGHTHEADER  [MINIFIT-10CKT-STRAIGHTHEADER]  46.48,8.38 90 top
U$46  MIC2005A-1YM5  [SOT23-5]  173.99,48.97 90 bottom
U$47  USB-DUAL-SOCKET  [USB-DUAL-SOCKET]  225.83,45.97 90 top
U$48  MIC2005A-1YM5  [SOT23-5]  173.99,60.45 90 bottom
U$49  MIC2005A-1YM5  [SOT23-5]  201.93,70.66 270 bottom
U$50  PLATED-HOLE  [PLATED-HOLE]  19.57,110.89 0 top
U$51  MIC2005A-1YM5  [SOT23-5]  201.93,82.09 270 bottom
U$52  MICROFIT-4CKT-HEADER  [MICROFIT-4CKT-HEADER]  110.24,130.81 0 top
U$53  MIC2005A-1YM5  [SOT23-5]  201.96,11.3 270 bottom
U$54  MIC2005A-1YM5  [SOT23-5]  171.7,13.46 90 bottom
U$55  LTC6103  [MSOP8]  187.71,125.48 270 top
U$56  LTC6103  [MSOP8]  187.71,107.7 270 top
U$57  ADS1115  [SOP50P490X110-10N]  179.83,115.32 180 top
U$58  LVK25R002FER(CURRENT-SENSE-R)  [LVK25R002FER(CURRENT-SENSE-R)]  190.25,137.67 180 top
U$59  LVK25R002FER(CURRENT-SENSE-R)  [LVK25R002FER(CURRENT-SENSE-R)]  190.25,122.17 180 top
U$60  LTC6103  [MSOP8]  187.71,89.41 270 top
U$61  MICROFIT-4CKT-HEADER  [MICROFIT-4CKT-HEADER]  121.16,130.81 0 top
U$62  ADS1115DGST  [SOP50P490X110-10N]  179.83,96.52 180 top
U$63  LVK25R002FER(CURRENT-SENSE-R)  [LVK25R002FER(CURRENT-SENSE-R)]  190.25,103.12 180 top
U$64  MICROFIT-4CKT-HEADER  [MICROFIT-4CKT-HEADER]  132.08,130.81 0 top
U$65  MICROFIT-4CKT-HEADER  [MICROFIT-4CKT-HEADER]  156.21,130.56 0 top
U$66  [BBAUV-LOGO-4]  81.79,27.43 0 top
U$67  [BBAUV-LOGO-4]  52.07,139.45 0 top
U$68  [BBAUV-LOGO-4]  3.05,77.72 270 top
U$70  PLATED-HOLE  [PLATED-HOLE]  187,140.4 0 top
U$76  N-MOS-SOIC8  [SOIC8]  197.26,88.44 90 bottom
U$77  N-MOS  [SOIC8]  191.54,129.11 90 bottom
U$78  N-MOS-SOIC8  [SOIC8]  191.54,109.7 90 bottom

## Library data of the parts
12VFAN JP5 JP6 JP8-JP10 KILL-SWITCH = jumper
24AA1026 = backplaneBBAUVv3; MPN: 24AA1026-I/SM; OC_FARNELL: 1971893; OC_NEWARK: 59T0229; PACKAGE: SOIC-8; SUPPLIER: MICROCHIP
AD7414-1 U$18 U$34 U$40 U$57 U$62 = bbauv
ADUM1-ADUM4 ADUM1402 = backplaneBBAUVv3; MPN: ADUM1402ARWZ; OC_FARNELL: 1226223; OC_NEWARK: 19M0759; PACKAGE: SOIC-16; SUPPLIER: Analog Devices
C1-C19 C22-C26 C29-C48 C51 C52 C57-C60 = SparkFun-Capacitors
C20 C21 C27 C28 = SparkFun-Capacitors; OC_NEWARK: unknown; PROD_ID: CAP-08064
C53-C56 R31-R42 R45 R49-R72 R74-R78 R93 R94 R103 = SparkFun-Passives
D1-D4 ISP ISP-BP LED1-LED5 = adafruit
FERRITE FERRITE1-FERRITE6 LTC4416 P-MOS P-MOS1-P-MOS6 U$1-U$10 U$12-U$15 U$17 U$19-U$24 U$26-U$33 U$35-U$38 U$41 U$44-U$51 U$53-U$56 U$58-U$60 U$63 U$66-U$68 U$70 U$76-U$78 = backplaneBBAUVv3
I2C = con-lstb; OC_FARNELL: unknown; OC_NEWARK: unknown
LED-STRIP1 LED-STRIP2 = SparkFun-Connectors
MCP2515-I/SO U$25 = backplaneBBAUVv3; MPN: MCP2515-I/SO; OC_FARNELL: 1292239; OC_NEWARK: 29H7136; PACKAGE: SOIC-18; SUPPLIER: Microchip
Q1 Q2 Q6 = SparkFun-DiscreteSemi; PROD_ID: TRANS-08049
Q3-Q5 Q7 = adafruit; OC_FARNELL: unknown; OC_NEWARK: unknown
R1 R2 R19-R26 R81-R92 = resistor
R3-R18 R27-R30 R43 R44 R46-R48 R73 R79 R80 R95 R101 R102 R104 R105 = SparkFun-Resistors
RX RX-BP RX-CAN RX-PMB1 RX-PMB2 RX-SA RX-TE RX-TH RXCAN SA SW_5V_BP SW_5V_CAN SW_5V_SA SW_5V_TE SW_5V_TH SW_USB_BP SW_USB_CAN SW_USB_PMB1 SW_USB_PMB2 SW_USB_SA SW_USB_SA1 SW_USB_TE TE TH TX TX-BP TX-CAN TX-PMB1 TX-PMB2 TX-SA TX-TE TX-TH TXCAN = led
SPARE SPARE2 = pinhead
SW1 SW2 = ver4
U1 = SparkFun-DigitalIC; PROD_ID: IC-09069
U2 U3 U6-U9 U11 = SparkFun-DigitalIC; PROD_ID: IC-00870
U4 U5 = backplaneBBAUVv3; MPN: DCR010505U; OC_FARNELL: 1212384; OC_NEWARK: 84K1268; PACKAGE: SSOP-12; SUPPLIER: TEXAS INSTRUMENTS
U13 = backplaneBBAUVv3; DESCRIPTION: Microcontroller; MPN: ATMEGA2560-16AU; OC_FARNELL: 1288330; OC_NEWARK: 23M5051; PACKAGE: LQFP-100; SUPPLIER: ATMEL
U$11 U$16 = FCN-365J040-BACKPLANE-JACK
U$39 = molex-minifit-10ckt2row-w2b-90degheader
U$52 U$61 U$64 U$65 = microfit-4ckt-2row-header

## Nets
3.3V: U$11.B19 U$39.A5 U$39.B5
5V: 24AA1026.8 AD7414-1.3 C20.1 C21.1 C27.1 C28.1 C47.1 C55.1 C56.1 I2C.4 LED5.A MCP2515-I/SO.18 P-MOS1.1 P-MOS1.2 P-MOS1.3 P-MOS5.1 P-MOS5.2 P-MOS5.3 P-MOS6.1 P-MOS6.2 P-MOS6.3 R17.2 R27.2 R29.2 R43.2 R46.2 R48.1 R72.1 R73.2 R79.2 R103.1 U1.4 U1.6 U4.1 U4.2 U5.1 U5.2 U13.10 U13.31 U13.61 U13.80 U13.100 U$1.P$3 U$5.POS U$10.P$6 U$17.P$6 U$18.8 U$19.P$6 U$22.POS U$24.1 U$24.3 U$25.18 U$34.1 U$39.A3 U$39.B3 U$40.1 U$54.1 U$54.3 U$57.8 U$62.1 U$62.8
5V_ADC: R17.1 R18.2 U13.93
5V_CAN_BP: C19.2 C54.P$1 R44.1 U5.14 U$40.8
5V_UART_CAN: C26.2 C53.P$1 R47.1 U4.14 U$34.8
5VSA: P-MOS1.5 P-MOS1.6 P-MOS1.7 P-MOS1.8 R68.1 U$16.B19 U$46.1 U$46.3
5VTE: P-MOS6.5 P-MOS6.6 P-MOS6.7 P-MOS6.8 R66.1 U$11.B20 U$48.1 U$48.3
5VTH: P-MOS5.5 P-MOS5.6 P-MOS5.7 P-MOS5.8 R67.1 U$33.1 U$33.3 U$45.L2
12IDSFI1: JP5.1 JP8.1 JP10.3 KILL-SWITCH.2 Q2.2
12V: 12VFAN.1 LED-STRIP1.1 LED-STRIP2.1 R15.2 U$1.P$2 U$13.PIN1 U$39.A2 U$39.B2
12V-TO-M4: U$39.A4 U$39.B4 U$64.BOT1 U$64.TOP1
12V_ADC: R15.1 R16.2 U13.92
24V1: LTC4416.8 P-MOS3.1 P-MOS3.2 P-MOS3.3 P-MOS.1 P-MOS.2 P-MOS.3 R101.2 U$20.I2
24V1_ADC: R101.1 R102.2 U13.94
24V2: U$20.I1 U$21.I2 U$52.BOT1 U$52.TOP1 U$61.BOT1 U$61.TOP1
24V2SA: U$14.BOT1 U$14.BOT2 U$14.BOT3 U$14.BOT4 U$15.T5 U$16.B20 U$21.I1
24V-ACOU: U$3.U4 U$3.U5 U$58.I1
24V-NAV: U$27.U4 U$27.U5 U$63.I1
24V-POE: U$1.P$4 U$58.I2 U$59.I2 U$63.I2 U$65.BOT1 U$65.TOP1
24V-SONAR: U$26.U4 U$26.U5 U$59.I1
A+: U$26.L1 U$26.U1
A-: U$26.L2 U$26.U2
ACOU-A+: U$3.L1 U$3.U1
ACOU-A-: U$3.L2 U$3.U2
ACOU-B+: U$3.L3 U$3.U3
ACOU-B-: U$3.L6 U$3.U6
ACOU_EN: U13.51 U$77.4
ACOU_GND: U$3.U7 U$3.U8 U$77.5 U$77.6 U$77.7 U$77.8
B1: LED-STRIP2.2 U$16.B16
B2: LED-STRIP1.2 U$16.A16
B+: U$26.L3 U$26.U3
B-: U$26.L6 U$26.U6
BATT1: LED1.A LED2.C LTC4416.9 P-MOS4.1 P-MOS4.2 P-MOS4.3 R1.2 R6.2 R11.2 U$4.L5 U$4.L6 U$4.U5 U$4.U6 U$37.LL U$37.LR U$37.UL U$37.UR
BATT1_ADC: R11.1 R12.2 U13.95
BATT2: LED3.A LED4.C LTC4416.7 P-MOS2.1 P-MOS2.2 P-MOS2.3 R10.2 R13.2 U$4.L7 U$4.L8 U$4.U7 U$4.U8 U$38.LL U$38.LR U$38.UL U$38.UR
BATT2_ADC: R13.1 R14.2 U13.96
CAN_RXD: RXCAN.A U$25.2 U$34.2
CAN_RXD_BP: MCP2515-I/SO.2 RX.A U$40.2
CAN_TXD_BP: MCP2515-I/SO.1 TX.A U$40.3
CANH: R104.2 R105.2 U$10.P$4 U$11.A1 U$16.A1 U$17.P$4 U$19.P$4 U$34.7 U$40.7 U$45.L1
CANL: R104.1 R105.1 U$10.P$3 U$11.A2 U$16.A2 U$17.P$3 U$19.P$3 U$34.6 U$40.6 U$45.U1
CTS_BP: ADUM1402.11
CTS_CAN: ADUM1.11
CTS_CAN_ISO: ADUM1.6
CTS_TH_ISO: ADUM2.6
D+_BP: U2.15 U$30.U3
D+_CAN: U6.15 U$41.U3
D+_PMB1: U9.15 U$29.L3
D+_PMB2: U11.15 U$29.U3
D+_SA: U7.15 U$47.L3
D+_TE: U8.15 U$47.U3
D+_TH: U3.15 U$30.L3
D-_BP: U2.16 U$30.U2
D-_CAN: U6.16 U$41.U2
D-_PMB1: U9.16 U$29.L2
D-_PMB2: U11.16 U$29.U2
D-_SA: U7.16 U$47.L2
D-_TE: U8.16 U$47.U2
D-_TH: U3.16 U$30.L2
DTR_BP: ADUM1402.13 C44.1
DTR_BP_ISO: ADUM1402.4 U2.2
DTR_CAN: ADUM1.13 C41.1
DTR_CAN_ISO: ADUM1.4 U6.2
DTR_PMB1_ISO: U9.2 U$8.P$6
DTR_PMB2_ISO: U11.2 U$9.P$6
DTR_SA: ADUM3.13 U$16.B2
DTR_SA_ISO: ADUM3.4 U7.2
DTR_TE: ADUM4.13 U$11.B2
DTR_TE_ISO: ADUM4.4 U8.2
DTR_TH: ADUM2.13 U$45.L3
DTR_TH_ISO: ADUM2.4 U3.2
G1: LED-STRIP2.3 U$16.B17
G2: LED-STRIP1.3 U$16.A17
GATE1: LTC4416.10 P-MOS3.4 P-MOS4.4
GATE2: LTC4416.6 P-MOS2.4 P-MOS.4
GND: 12VFAN.2 24AA1026.2 24AA1026.3 24AA1026.4 24AA1026.7 AD7414-1.1 AD7414-1.2 ADUM1.9 ADUM1.15 ADUM2.9 ADUM2.15 ADUM3.9 ADUM3.15 ADUM4.9 ADUM4.15 ADUM1402.9 ADUM1402.15 C4.2 C6.2 C10.2 C12.2 C15.1 C16.1 C17.1 C18.1 C19.1 C20.2 C21.2 C22.1 C23.1 C25.2 C26.1 C27.2 C28.2 C30.2 C32.2 C36.2 C38.2 C42.1 C43.1 C47.2 C48.1 C55.2 C56.2 C58.2 I2C.1 ISP-BP.6 ISP.6 JP8.3 JP10.1 KILL-SWITCH.1 LTC4416.3 MCP2515-I/SO.9 R2.1 R12.1 R14.1 R16.1 R18.1 R19.2 R20.2 R23.2 R24.2 R36.2 R42.2 R54.2 R60.2 R61.1 R62.1 R78.2 R81.2 R82.2 R85.2 R86.2 R89.2 R90.2 R93.1 R94.1 R95.1 R102.1 SA.C SW1.P$1 SW1.P$4 SW2.P$1 SW2.P$4 TE.C TH.C U1.3 U1.21 U4.13 U4.26 U4.27 U5.13 U5.26 U5.27 U13.11 U13.32 U13.62 U13.81 U13.99 U$1.P$1 U$2.P$1 U$4.L1 U$4.L2 U$4.L3 U$4.L4 U$4.U1 U$4.U2 U$4.U3 U$4.U4 U$5.NEG U$6.4 U$7.3 U$10.P$1 U$11.A19 U$11.A20 U$11.B1 U$12.4 U$14.TOP3 U$14.TOP4 U$16.A19 U$16.A20 U$16.B1 U$17.P$1 U$18.3 U$19.P$1 U$22.NEG U$24.2 U$25.9 U$32.3 U$33.2 U$34.4 U$34.5 U$39.A1 U$39.B1 U$40.4 U$40.5 U$45.U2 U$46.2 U$48.2 U$52.BOT2 U$52.TOP2 U$54.2 U$55.4 U$56.4 U$57.3 U$60.4 U$61.BOT2 U$61.TOP2 U$62.3 U$64.BOT2 U$64.TOP2 U$65.BOT2 U$65.TOP2 U$70.P$1 U$76.1 U$76.2 U$76.3 U$77.1 U$77.2 U$77.3 U$78.1 U$78.2 U$78.3
GND_IN: C1.2 C2.2 D1.A D3.A R3.1 R4.1 R5.1 R7.1 R8.1 R9.1 U$7.2 U$32.2 U$35.LL U$35.LR U$35.UL U$35.UR U$36.LL U$36.LR U$36.UL U$36.UR
INT_BP: MCP2515-I/SO.12
INTERRUPT_UART_CAN: U$25.12
L1: U$14.TOP1 U$16.B15
L2: U$14.TOP2 U$16.A15
LVE1: ADUM1402.7 R32.1
LVE2: ADUM2.7 R38.1
LVE3: ADUM3.7 R50.1
LVE4: ADUM4.7 R56.1
LVE7: ADUM1.7 R74.1
M1: U$15.B5 U$16.B14
M2: U$15.B4 U$16.A14
M3: U$15.T4 U$16.B13
M4: U$15.B3 U$16.A13
M5: U$15.T3 U$16.B12
M6: U$15.B2 U$16.A12
M7: U$15.T2 U$16.B11
M8: U$15.B1 U$16.A11
M9: U$15.T1 U$16.B10
MISO_BP: ISP-BP.1 MCP2515-I/SO.15 U13.22
MISO_UART_CAN: ISP.1 U1.16 U$25.15
MOSI_BP: ISP-BP.4 MCP2515-I/SO.14 U13.21
MOSI_UART_CAN: ISP.4 U1.15 U$25.14
N$1: P-MOS3.5 P-MOS3.6 P-MOS3.7 P-MOS3.8 P-MOS4.5 P-MOS4.6 P-MOS4.7 P-MOS4.8
N$2: P-MOS2.5 P-MOS2.6 P-MOS2.7 P-MOS2.8 P-MOS.5 P-MOS.6 P-MOS.7 P-MOS.8
N$3: R33.2 TX-BP.C
N$4: R33.1 U2.23
N$5: R34.2 RX-BP.C
N$6: FERRITE.2 U$23.1 U$23.3
N$7: ADUM1402.10 R31.1
N$8: R35.2 SW_USB_BP.C
N$9: R36.1 SW_5V_BP.A
N$10: R39.2 RX-TH.C
N$11: R34.1 U2.22
N$12: R40.2 TX-TH.C
N$13: ADUM2.10 R37.1
N$14: FERRITE1.2 U$31.1 U$31.3
N$15: R41.2 SW_USB_SA.C
N$16: R39.1 U3.22
N$17: R40.1 U3.23
N$18: R42.1 SW_5V_TH.A
N$19: C22.2 Q3.1 U$25.7
N$20: C23.2 Q3.2 U$25.8
N$21: C15.2 MCP2515-I/SO.7 Q4.1
N$22: C16.2 MCP2515-I/SO.8 Q4.2
N$23: R46.1 U$25.17
N$24: C42.2 Q7.1 U1.7
N$25: MCP2515-I/SO.17 R43.1
N$26: U13.8
N$27: R47.2 U4.17
N$28: R51.2 TX-SA.C
N$29: R52.2 RX-SA.C
N$30: ADUM3.10 R49.1
N$31: FERRITE2.2 U$44.1 U$44.3
N$32: R53.2 SW_USB_SA1.C
N$33: R51.1 U7.23
N$34: R52.1 U7.22
N$35: LED2.A R3.2
N$36: LED1.C R4.2
N$37: R54.1 SW_5V_SA.A
N$38: R57.2 TX-TE.C
N$39: R58.2 RX-TE.C
N$40: ADUM4.10 R55.1
N$41: FERRITE3.2 U$28.1 U$28.3
N$42: R59.2 SW_USB_TE.C
N$43: R61.2 TXCAN.C
N$44: U13.54
N$45: U$11.A3
N$46: U$11.A4
N$47: U$11.A5
N$48: U$11.A6
N$49: U$11.A7
N$50: U$11.A8
N$51: U$11.A9
N$52: U$11.A10
N$53: U$11.A11
N$54: U$11.A12
N$55: U$11.A13
N$56: U$11.A14
N$57: U$11.A15
N$58: U$11.A16
N$59: U$11.A17
N$60: U$11.A18
N$61: R62.2 RXCAN.C
N$62: R93.2 TX.C
N$63: R63.2 TX-PMB1.C
N$64: R64.2 RX-PMB1.C
N$65: R66.2 TE.A
N$66: FERRITE4.2 U$49.1 U$49.3
N$67: U$11.B5
N$68: U$11.B6
N$69: U$11.B7
N$70: U$11.B8
N$71: U$11.B9
N$72: U$11.B10
N$73: U$11.B11
N$74: U$11.B12
N$75: U$11.B13
N$76: U$11.B14
N$77: U$11.B15
N$78: U$11.B16
N$79: U$11.B17
N$80: U$11.B18
N$81: R75.2 RX-CAN.C
N$82: R76.2 TX-CAN.C
N$83: R67.2 TH.A
N$84: R57.1 U8.23
N$85: R58.1 U8.22
N$86: R60.1 SW_5V_TE.A
N$87: JP5.2 P-MOS5.4 R29.1
N$88: JP5.3 Q2.3
N$89: JP6.2 P-MOS1.4 R27.1
N$90: Q2.1 R30.1
N$91: JP6.3 Q1.3
N$92: Q1.1 R28.1
N$93: JP6.1 JP8.2 Q1.2
N$94: ADUM1.10 R45.1
N$95: R65.2 SW_USB_PMB1.C
N$96: R63.1 U9.23
N$97: R64.1 U9.22
N$98: R68.2 SA.A
N$99: R69.2 TX-PMB2.C
N$100: R70.2 RX-PMB2.C
N$101: R44.2 U5.17
N$102: R75.1 U6.22
N$103: FERRITE5.2 U$51.1 U$51.3
N$104: R71.2 SW_USB_PMB2.C
N$105: R69.1 U11.23
N$106: R70.1 U11.22
N$107: R76.1 U6.23
N$108: R94.2 RX.C
N$109: LED5.C R95.2
N$112: AD7414-1.5
N$113: U13.55
N$114: U13.56
N$115: LTC4416.2 R1.1
N$116: LTC4416.4 R2.2
N$117: C48.2 U13.98
N$118: C43.2 Q7.2 U1.8
N$119: U13.57
N$120: U13.58
N$121: C17.2 Q5.1 U13.33
N$122: C18.2 Q5.2 U13.34
N$123: U13.25
N$124: U13.26
N$125: U1.18
N$126: U13.59
N$128: U13.72
N$129: U13.71
N$130: ISP-BP.2
N$131: ISP.2
N$132: FERRITE6.2 U$53.1 U$53.3
N$133: R77.2 SW_USB_CAN.C
N$134: U13.60
N$136: R78.1 SW_5V_CAN.A
N$138: Q6.1 R80.1
N$139: JP9.3 Q6.3
N$140: JP9.2 P-MOS6.4 R79.1
N$141: JP9.1 JP10.2 Q6.2
N$142: R83.1 U$55.5 U$58.V1
N$143: R84.1 U$55.8 U$58.V2
N$144: R81.1 U$55.1 U$57.4
N$145: R82.1 U$55.2 U$57.5
N$146: U$55.3
N$147: R83.2 U$55.7
N$148: R84.2 U$55.6
N$149: R87.1 U$56.5 U$59.V1
N$150: R88.1 U$56.8 U$59.V2
N$151: R85.1 U$56.1 U$57.7
N$152: R86.1 U$56.2 U$57.6
N$153: U$56.3
N$154: R87.2 U$56.7
N$155: R88.2 U$56.6
N$156: U$57.2
N$158: R91.1 U$60.5 U$63.V1
N$159: R92.1 U$60.8 U$63.V2
N$160: R89.1 U$60.1 U$62.4
N$161: R90.1 U$60.2 U$62.5
N$162: U$60.3
N$163: R91.2 U$60.7
N$164: R92.2 U$60.6
N$172: U$62.2
N$173: U13.45
N$182: U13.46
N$183: U13.47
N$184: U13.48
N$188: U13.4
N$189: U13.5
N$190: U13.6
N$191: U13.7
N$193: U13.9
N$205: U13.91
N$206: U13.90
N$207: C1.1 D2.A R5.2 R6.1 U$32.1
N$208: LED4.A R7.2
N$209: D1.C D2.C
N$210: LED3.C R8.2
N$211: C2.1 D4.A R9.2 R10.1 U$7.1
N$212: D3.C D4.C
N$215: U13.12
N$216: U13.13
N$217: U13.14
N$218: U13.15
N$219: U13.16
N$221: U13.18
N$222: U13.27
N$223: U13.63
N$224: U13.64
N$225: U13.65
N$226: U13.66
N$227: U13.23
N$228: U13.24
N$229: U13.67
N$230: U13.68
N$231: U13.69
N$232: U13.79
N$233: U13.89
N$234: U13.88
N$235: U13.87
N$236: U13.86
N$237: U13.85
N$238: U13.84
N$239: U13.83
N$240: U13.82
N$241: U13.35
N$242: U13.36
N$243: U13.37
N$244: U13.38
N$245: U13.39
N$246: U13.40
N$247: U13.41
N$248: U13.42
N$251: U13.70
N$252: U13.28
N$253: U13.29
N$254: U13.1
N$263: R21.1 U$6.5 U$20.V1
N$267: R22.1 U$6.8 U$20.V2
N$276: R19.1 U$6.1 U$18.7
N$279: R20.1 U$6.2 U$18.6
N$280: U$6.3
N$282: R21.2 U$6.7
N$284: R22.2 U$6.6
N$285: R25.1 U$12.5 U$21.V1
N$287: R26.1 U$12.8 U$21.V2
N$289: R23.1 U$12.1 U$18.4
N$290: R24.1 U$12.2 U$18.5
N$291: U$12.3
N$292: R25.2 U$12.7
N$293: R26.2 U$12.6
N$294: U$18.2
NAV-A+: U$27.L1 U$27.U1
NAV-A-: U$27.L2 U$27.U2
NAV-B+: U$27.L3 U$27.U3
NAV-B-: U$27.L6 U$27.U6
NAV_EN: U13.53 U$76.4
NAV_GND: U$27.U7 U$27.U8 U$76.5 U$76.6 U$76.7 U$76.8
PRES: U$13.PIN2 U$16.A10
R1: LED-STRIP2.4 U$16.B18
R2: LED-STRIP1.4 U$16.A18
RESET_BP: C44.2 ISP-BP.5 R103.2 SW2.P$2 SW2.P$3 U13.30
RESET_UART_CAN: C41.2 ISP.5 R72.2 SW1.P$2 SW1.P$3 U1.29
RX_BP: ADUM1402.14 U13.2
RX_BP_ISO: ADUM1402.3 U2.1
RX_CAN: ADUM1.14 TXCAN.A U1.30 U$25.1 U$34.3
RX_CAN_ISO: ADUM1.3 U6.1
RX_PMB1_ISO: U9.1 U$8.P$4
RX_PMB2_ISO: U11.1 U$9.P$4
RX_SA: ADUM3.14 U$16.B3
RX_SA_1: SPARE2.2 U$16.A3
RX_SA_ISO: ADUM3.3 U7.1
RX_TE: ADUM4.14 U$11.B3
RX_TE_ISO: ADUM4.3 U8.1
RX_TH: ADUM2.14 U$45.U4
RX_TH_ISO: ADUM2.3 U3.1
SA_EN: R28.2 U13.50
SCK_BP: ISP-BP.3 MCP2515-I/SO.13 U13.20
SCK_UART_CAN: ISP.3 U1.17 U$25.13
SCL: 24AA1026.6 AD7414-1.4 I2C.2 U13.43 U$18.1 U$18.10 U$57.10 U$62.10
SDA: 24AA1026.5 AD7414-1.6 I2C.3 U13.44 U$18.9 U$57.1 U$57.9 U$62.9
SONAR_EN: U13.52 U$78.4
SONAR_GND: U$26.U7 U$26.U8 U$78.5 U$78.6 U$78.7 U$78.8
SPARE1: SPARE.2 U$16.B9
SPARE2: SPARE.4 U$16.B8
SPARE3: SPARE.6 U$16.B7
SPARE4: SPARE.8 U$16.B6
SPARE5: SPARE.10 U$16.B5
SPARE6: SPARE.1 U$16.A9
SPARE7: SPARE.3 U$16.A8
SPARE8: SPARE.5 U$16.A7
SPARE9: SPARE.7 U$16.A6
SPARE10: SPARE.9 U$16.A5
SPARE_TH_1: U$45.U3
SPARE_TH_2: U$45.U5
SPARE_TH_3: U$45.L5
SS_BP: MCP2515-I/SO.16 R73.1 U13.17
SS_UART_CAN: R48.2 U1.12 U$25.16
SW_5V_BP: ADUM1402.16 C4.1 C6.1 R31.2 SW_5V_BP.C U$24.5
SW_5V_CAN: ADUM1.16 C25.1 C58.1 R45.2 SW_5V_CAN.C U$54.5
SW_5V_SA: ADUM3.16 C30.1 C32.1 R49.2 SW_5V_SA.C U$46.5
SW_5V_TE: ADUM4.16 C36.1 C38.1 R55.2 SW_5V_TE.C U$48.5
SW_5V_TH: ADUM2.16 C10.1 C12.1 R37.2 SW_5V_TH.C U$33.5
SW_USB+_BP: ADUM1402.1 C3.1 C5.1 C7.1 C8.1 R32.2 R35.1 RX-BP.A TX-BP.A U2.4 U2.20 U$23.5
SW_USB+_CAN: ADUM1.1 C24.1 C57.1 C59.1 C60.1 R74.2 R77.1 RX-CAN.A TX-CAN.A U6.4 U6.20 U$53.5
SW_USB+_PMB1: C45.1 C46.1 R65.1 RX-PMB1.A TX-PMB1.A U9.4 U9.20 U$8.P$3 U$49.5
SW_USB+_PMB2: C51.1 C52.1 R71.1 RX-PMB2.A TX-PMB2.A U11.4 U11.20 U$9.P$3 U$51.5
SW_USB+_SA: ADUM3.1 C29.1 C31.1 C33.1 C34.1 R50.2 R53.1 RX-SA.A TX-SA.A U7.4 U7.20 U$44.5
SW_USB+_TE: ADUM4.1 C35.1 C37.1 C39.1 C40.1 R56.2 R59.1 RX-TE.A TX-TE.A U8.4 U8.20 U$28.5
SW_USB+_TH: ADUM2.1 C9.1 C11.1 C13.1 C14.1 R38.2 R41.1 RX-TH.A TX-TH.A U3.4 U3.20 U$31.5
TE_EN: R80.2 U13.49
TH_EN: R30.2 U13.97
TX_BP: ADUM1402.12 U13.3
TX_BP_ISO: ADUM1402.5 U2.5
TX_CAN: ADUM1.12 U1.31
TX_CAN_ISO: ADUM1.5 U6.5
TX_PMB1_ISO: U9.5 U$8.P$5
TX_PMB2_ISO: U11.5 U$9.P$5
TX_SA: ADUM3.12 U$16.B4
TX_SA_1: SPARE2.1 U$16.A4
TX_SA_ISO: ADUM3.5 U7.5
TX_TE: ADUM4.12 U$11.B4
TX_TE_ISO: ADUM4.5 U8.5
TX_TH: ADUM2.12 U$45.L4
TX_TH_ISO: ADUM2.5 U3.5
USB+_BP: FERRITE.1 U$30.U1
USB+_CAN: FERRITE6.1 U$41.U1
USB+_PMB1: FERRITE4.1 U$29.L1
USB+_PMB2: FERRITE5.1 U$29.U1
USB+_SA: FERRITE2.1 U$47.L1
USB+_TE: FERRITE3.1 U$47.U1
USB+_TH: FERRITE1.1 U$30.L1
USB-_BP: ADUM1402.2 ADUM1402.8 C3.2 C5.2 C7.2 C8.2 SW_USB_BP.A U2.7 U2.18 U2.21 U2.25 U2.26 U$23.2 U$30.CHA3 U$30.CHA4 U$30.U4
USB-_CAN: ADUM1.2 ADUM1.8 C24.2 C57.2 C59.2 C60.2 SW_USB_CAN.A U6.7 U6.18 U6.21 U6.25 U6.26 U$41.CHA1 U$41.CHA2 U$41.CHA3 U$41.CHA4 U$41.U4 U$53.2
USB-_PMB1: C45.2 C46.2 SW_USB_PMB1.A U9.7 U9.18 U9.21 U9.25 U9.26 U$8.P$1 U$29.CHA1 U$29.CHA2 U$29.L4 U$49.2
USB-_PMB2: C51.2 C52.2 SW_USB_PMB2.A U11.7 U11.18 U11.21 U11.25 U11.26 U$9.P$1 U$29.CHA3 U$29.CHA4 U$29.U4 U$51.2
USB-_SA: ADUM3.2 ADUM3.8 C29.2 C31.2 C33.2 C34.2 SW_USB_SA1.A U7.7 U7.18 U7.21 U7.25 U7.26 U$44.2 U$47.CHA1 U$47.CHA2 U$47.L4
USB-_TE: ADUM4.2 ADUM4.8 C35.2 C37.2 C39.2 C40.2 SW_USB_TE.A U8.7 U8.18 U8.21 U8.25 U8.26 U$28.2 U$47.CHA3 U$47.CHA4 U$47.U4
USB-_TH: ADUM2.2 ADUM2.8 C9.2 C11.2 C13.2 C14.2 SW_USB_SA.A U3.7 U3.18 U3.21 U3.25 U3.26 U$30.CHA1 U$30.CHA2 U$30.L4 U$31.2
VREC: C54.P$2 U5.12 U5.16
VREC2: C53.P$2 U4.12 U4.16

## Tracks (layer width: path | path; a pad name or v marks a point on that pad's centre or on a via)
3.3V  (via drill 0.33)
  Top 0.406: 166.29,97.94 166.24,97.89 166.24,100.33
  Top 0.61: U$11.B19 166.29,97.94 166.29,105.87 v166.24,105.92 | v162.81,121.54 158.94,121.54 U$39.A5 U$39.B5
  Bottom 0.61: v162.81,121.54 166.24,118.11 v166.24,105.92
5V  (via drill 0.3, 0.33, 0.33 pad 0.25, 0.33 pad 1.02, 0.33 pad 1.27, 0.51 pad 1.02, 0.76 pad 1.02, 0.76 pad 1.27)
  Top 0.305: U$18.8 77.95,118.87 v76.96,117.88 77.04,117.88 | v77.9,97.94 78.85,98.89 U13.61 | U13.80 72.02,96.58 v73.38,97.94 | U13.10 76.36,89.39 v77.09,90.12 77.11,90.09 82.65,90.09 83.66,89.09 U13.31 | U13.100 71.33,86.6 73.3,88.57 v73.3,90.12 | v71.45,117.86 v73.79,117.86 | 70.16,86.56 U13.100 | U13.100 70.08,86.56 69.24,86.56 69.14,86.46 69.14,82.36 C47.1 | v173.48,116.08 174.27,115.29 176.99,115.29 177.01,115.32 U$57.8 | v181.79,94.51 181.79,95.3 U$62.1 | U$62.8 172.11,96.52 170.69,97.94 v170.69,99.42 | MCP2515-I/SO.18 71.19,63.25 70.93,63.5 v65.66,63.5 | R73.2 62.79,66.38 C55.1 61.51,64.6 61.59,64.52 | 68.52,63.5 v65.66,63.5 | 56.26,64.64 56.39,64.52 61.59,64.52 | 61.59,64.52 62.61,63.5 v65.66,63.5 | U5.1 55.88,61.7 55.88,64.52 | R43.2 66.17,63.56 v65.66,63.5 | 82.42,61.34 84.1,63.02 R103.1 | 69.14,25.35 66.08,25.35 R29.2 | U1.6 152.42,18.92 152.55,19.05 153.82,19.05 | 153.82,19.05 v153.87,19.1 | 153.82,19.05 154.02,18.85 U1.4
  Top 0.406: 82.42,61.34 72.26,61.34 71.52,62.09 MCP2515-I/SO.18 | R48.1 146.32,20.1 v146.15,20.27 | v146.15,20.27 146.09,20.2 R46.2 143.88,19.33 U$25.18 | U$34.1 145.01,20.27 v146.15,20.27 | v142.37,115.32 142.37,119.76 141.73,120.4 139.45,120.4 138.68,119.63 138.68,118.62 I2C.4 | LED5.A 84.58,13.82 v84.58,16.76 | v115.06,16.76 115.06,18.82 U4.2
  Top 0.508: R72.1 v166.73,20.27 | U5.2 U5.1 | 56.15,64.52 55.88,64.52 C21.1 54.86,64.56 C20.1 58.05,64.6 C55.1
  Top 0.762: 31.49,32.9 v33.39,32.91 34.01,33.53 34.01,50.83 25.95,58.88 U$19.P$6 | 31.49,32.9 30.73,32.89 | v46.86,20.93 38.58,20.93 v33.39,15.73 25.48,15.73 U$17.P$6 | 31.49,32.9 29.66,32.9 U$10.P$6
  Top 0.813: P-MOS5.1 P-MOS5.2 62.75,18.29 P-MOS5.3 | 66.04,22 v65.91,22.12
  Top 1.016: U4.2 U4.1 117.58,20.27 v122.66,20.27 | v65.91,22.12 69.14,25.35 69.25,25.46 U$40.1 | v59.84,18.29 62.75,18.29 | P-MOS5.3 64.75,19.03 66.04,20.32 66.04,22
  Top 1.27: v70.22,114.15 70.22,108.19 v65.91,103.89 | v170.69,89.33 v170.69,63.25 | v70.23,132.08 70.36,132.08 71.63,133.35
  Bottom 0.305: v181.79,94.51 170.69,94.51 | 70.22,118.11 70.45,117.88 71.5,117.88 v71.45,117.86 | AD7414-1.3 74.83,96.5 v73.38,97.94 | 170.69,24.93 170.69,25.15 | U$24.1 170.69,36.31 | v73.79,117.86 76.96,117.86 v76.96,117.88 | U$54.1 169.16,12.51 169.16,14.48 | v173.48,116.08 170.74,116.08 170.69,116.13 | v65.66,63.5 65.91,63.88 | R79.2 157.3,106.92 P-MOS6.3
  Bottom 0.406: 170.51,14.51 U$54.3 | C56.1 105.59,16.83 C28.1 107.94,16.81 C27.1 115.02,16.81 v115.06,16.76 | 154.75,106.55 154.9,106.7 P-MOS6.1 154.75,106.74 154.38,106.38 148.39,106.38 146.05,108.71 146.05,110.77 24AA1026.8 143.45,110.81 142.75,111.51 142.75,114.94 v142.37,115.32 | v153.87,19.1 153.87,20.27 | 93.22,20.78 93.73,20.27 | v84.58,16.76 84.58,20.02 84.33,20.27
  Bottom 0.508: 122.99,20.75 v122.66,20.27 | U$54.3 170.34,14.48 169.16,14.48 | 65.96,96.52 67.39,97.94 v73.38,97.94 v77.9,97.94 | 65.91,89.13 66.9,90.12 v73.3,90.12 v77.09,90.12 | 170.51,61.4 170.69,61.66 | U$24.3 170.69,38.21 | 170.51,14.51 168.91,14.51 168.91,20.27 | v70.22,114.15 70.22,113.26 R17.2
  Bottom 0.762: P-MOS6.1 P-MOS6.2 | P-MOS6.2 P-MOS6.3 157.48,104.9 157.73,104.65 169.8,104.65 170.69,103.76 | P-MOS6.2 154.9,106.7 | v33.39,32.91 v33.39,15.73
  Bottom 1.016: v166.73,20.27 167.53,20.27 | v65.91,22.12 65.84,22.05 | 65.91,96.52 65.96,96.52 | v101.35,132.33 101.36,130.54 R27.2 101.36,115.77 P-MOS1.3 | v46.86,20.93 57.2,20.93 v59.84,18.29
  Bottom 1.27: v170.69,89.33 170.69,94.51 v170.69,99.42 170.69,103.76 170.69,116.13 170.69,132.69 171.15,133.15 175.24,133.15 U$1.P$3 | P-MOS1.1 P-MOS1.2 P-MOS1.3 | 65.91,96.52 v65.91,103.89 65.91,89.13 65.91,63.88 v65.91,22.12 67.77,20.27 84.33,20.27 93.73,20.27 v122.66,20.27 v146.15,20.27 153.87,20.27 v166.73,20.27 168.91,20.27 170.69,22.05 170.69,25.15 170.69,36.31 170.69,38.21 170.69,61.66 v170.69,63.25 | v70.23,132.08 70.22,129.91 70.22,118.11 v70.22,114.15
  pour Top (no thermals): 176.78,134.37 176.78,131.57 49.66,131.95 49.66,134.62
5V_ADC  (via drill 0.33 pad 0.25)
  Top 0.305: v73.86,101.91 73.91,101.96 73.91,104.9 74.73,105.72 74.73,112.39 v74.83,112.5 | v73.86,98.96 73.86,98.55 74.47,97.94 74.47,92.96 71.63,90.12 70.13,90.12 U13.93
  Bottom 0.305: v73.86,101.91 v73.86,98.96
  Bottom 0.406: R18.2 v74.83,112.5 R17.1 73.89,112.5
5V_CAN_BP  (via drill 0.33)
  Top 0.305: U5.14 56.33,45.02 v58.29,43.05
  Top 0.508: 64.15,39.03 R44.1 64.15,42.27 v63.25,43.18 | 64.15,39.03 C54.P$1 | C19.2 58.35,43 v58.29,43.05 | 64.15,39.03 67.36,35.06 U$40.8
  Bottom 0.508: v58.29,43.05 63.12,43.05 v63.25,43.18
5V_UART_CAN  (via drill 0.33)
  Top 0.406: U4.14 99.47,22.25 v102.36,25.15 | v105.16,27.94 v128.27,27.94 | v134.62,24.38 134.16,23.93 U$34.8
  Top 0.61: C53.P$1 93.41,11.06 R47.1 97.53,11.06 v98.17,11.71 | U4.14 99.47,17.27 v98.17,15.98 | v98.17,15.98 C26.2 98.16,15.97 v98.17,15.98
  Bottom 0.406: v102.36,25.15 v105.16,27.94 | v128.27,27.94 131.06,27.94 v134.62,24.38
  Bottom 0.61: v98.17,15.98 v98.17,11.71
5VSA  (via drill 0.33, 0.33 pad 0.25)
  Top 0.305: R68.1 97.04,108.81 103.07,108.81 103.51,109.25 v103.67,109.25
  Top 0.406: v172.59,45.72 172.34,45.47 166.75,45.47 163.83,48.39 v148.21,48.39 | v121.28,53.47 121.28,76.07 v121.54,76.33
  Bottom 0.203: U$46.3
  Bottom 0.254: 172.72,48.01 171.98,48.01 171.68,48.31 171.68,49.63 171.97,49.92 U$46.3
  Bottom 0.305: 172.72,48.01 172.71,48.01 U$46.1
  Bottom 0.406: 172.72,48.01 172.59,47.88 v172.59,45.72 | v148.21,48.39 121.79,48.39 121.28,48.9 v121.28,53.47 | v121.54,76.33 118.49,76.33 115.98,78.89 115.98,95.99 115.55,96.41 U$16.B19
  Bottom 0.508: v103.67,109.25 arc90 104.05,108.87
  Bottom 1.27: P-MOS1.8 P-MOS1.7 P-MOS1.6 P-MOS1.5 v103.67,109.25 104.05,108.87 105.79,107.13 105.79,97.54 104.67,96.41 U$16.B19
5VTE  (via drill 0.33, 0.33 pad 0.25)
  Top 0.305: v169.42,67.06 169.42,91.06 167.39,93.09 v167.39,98.81
  Top 0.406: v153.37,102.95 153.37,103.33 151.32,103.33 R66.1
  Bottom 0.203: 172.76,59.44 U$48.1
  Bottom 0.254: U$48.3 171.84,61.4 171.7,61.27 171.7,59.66 171.83,59.54 172.65,59.54 U$48.1
  Bottom 0.406: U$48.3 172.69,63.28 169.42,66.55 v169.42,67.06 | v167.39,98.81 164.9,98.81 U$11.B20 164.45,98.95 161.93,101.47 158.12,101.47 | v153.37,102.95 154.77,101.54 P-MOS6.8
  Bottom 1.27: 158.05,101.54 P-MOS6.6 P-MOS6.7 P-MOS6.8 | P-MOS6.5 158.05,101.54 | 158.05,101.54 158.12,101.47
5VTH  (via drill 0.33 pad 0.25)
  Top 0.406: v176.63,18.09 172.97,18.09 172.06,17.17 v172.06,16.92 | v168.66,10.41 168.4,10.29 168.4,6.22 165.18,3 49.23,3 46.18,6.04 46.18,18.23 49.44,21.5 | P-MOS5.8 57.67,16.49 R67.1
  Top 0.813: P-MOS5.8 P-MOS5.7 P-MOS5.6 P-MOS5.5 50.63,20.3 49.44,21.5
  Top 1.016: 49.44,21.5 U$45.L2
  Bottom 0.203: 172.7,24.94 U$33.1
  Bottom 0.254: U$33.3 172.09,26.83 171.7,26.44 171.7,25.2 171.98,24.92 172.68,24.92 U$33.1
  Bottom 0.305: U$33.1 172.69,24.67
  Bottom 0.406: 172.69,24.67 172.69,24.57 174.55,22.71 174.55,20.17 v176.63,18.09 | v172.06,16.92 172.03,12.37 170.08,10.41 v168.66,10.41
12IDSFI1  (via drill 0.33)
  Top 0.305: v101.55,112.42 101.4,112.27 96.62,112.27 | 96.62,112.27 88.95,112.27 85.65,108.97 85.65,106.53 84.84,105.72 KILL-SWITCH.2 81.61,107.7 v78.69,107.7 | v63.4,92.43 63.4,99.77 71.27,107.64 v72.01,107.64 | JP8.1 96.62,111.99 96.62,112.27 | v116.08,112.45 arc-90 116.15,112.52 116.99,113.36 148.46,113.36 | 148.49,113.36 148.46,113.36 | 148.46,113.36 v147.75,114.07
  Top 0.406: v51.71,27.89 52.43,27.18 56.39,27.18 57.3,26.26 Q2.2 59.09,24.25 JP5.1
  Bottom 0.305: v51.71,27.89 51.71,78.56 54.13,80.97 57.4,80.97 63.4,87.22 v63.4,92.43 | v116.08,112.45 116.05,112.42 v101.55,112.42 | v72.01,107.64 78.64,107.64 v78.69,107.7 | v147.75,114.07 149.68,112.14 JP10.3
12V  (via drill 0.33)
  Top 0.61: 12VFAN.1 116.08,50.68 U$13.PIN1
  Top 1.016: 120.09,76.71 120.09,76.81
  Top 1.27: U$13.PIN1 120.09,54.69 120.09,76.71 121.11,77.72 124.46,77.72 127.25,80.52 127.25,93.73 130.56,97.03 130.56,100.08 v127.51,103.12
  Bottom 0.762: R15.2 68.38,112.21 68.38,136.6 73.97,136.6 LED-STRIP1.1
  Bottom 1.27: v127.51,103.12 127.51,116.33 132.59,121.41 146.81,121.41 147.32,121.92 147.32,135.64 148.71,137.02 U$39.B2
  pour Top (no thermals): 176.78,138.4 176.78,135.18 49.66,135.43 49.66,138.66
12V-TO-M4
  pour Top (no thermals): 133.6,130.81 158.24,130.81 158.24,123.19 133.6,123.19
12V_ADC  (via drill 0.33 pad 0.25)
  Top 0.305: v73.86,109.42 73.86,107.95 66.75,100.84 66.75,91.69 67.87,90.58 70.1,90.58 U13.92
  Bottom 0.305: R15.1 73.81,109.47 v73.86,109.42
  Bottom 0.406: R15.1 R16.2
24V1  (via drill 0.33, 0.33 pad 1.02)
  Top 0.406: v56.13,112.14 56.13,112.27 55.57,112.27 P-MOS3.1 54.66,112.27
  Top 1.016: v66.95,113.54 62.37,113.54 P-MOS.2
  Top 1.27: P-MOS3.3 P-MOS3.2 P-MOS3.1 | P-MOS.3 P-MOS.2 P-MOS.1
  Bottom 0.305: LTC4416.8 56.13,110.3 v56.13,112.14
  Bottom 1.016: R101.2 70.98,106.87 66.95,110.9 v66.95,113.54